# Altium PCB GPS.PcbDoc
Units mm, origin at the board's own origin, x right, y up, seen from the top; angles counter-clockwise.
Board outline 41.35 x 34.25 mm, 4 copper layers (Top Layer, Inner Layer 1, Inner Layer 2, Bottom Layer), stack 0.778 mm thick; 80 components, 55 nets, 369 pads, 241 vias.
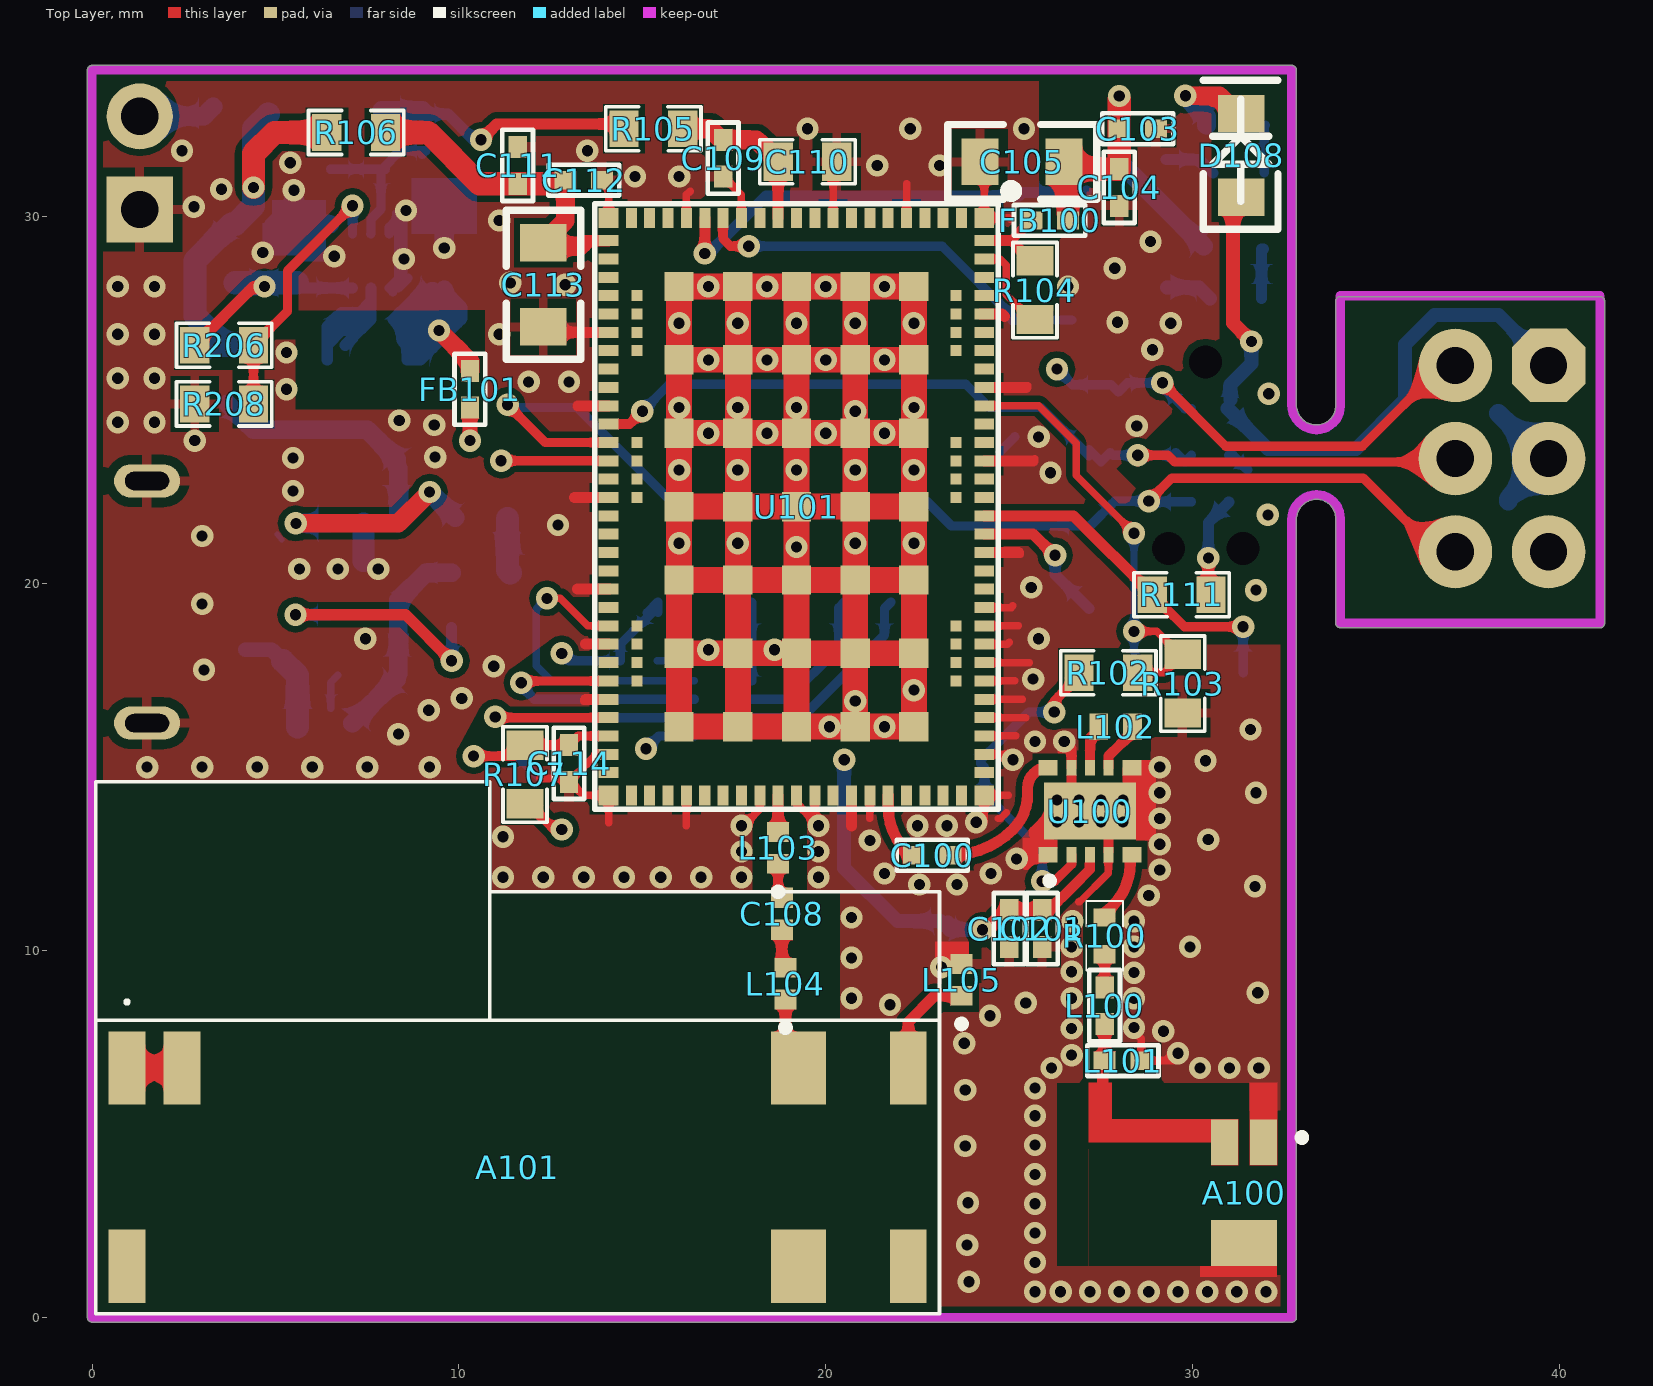
[diagram p0: Top Layer view]
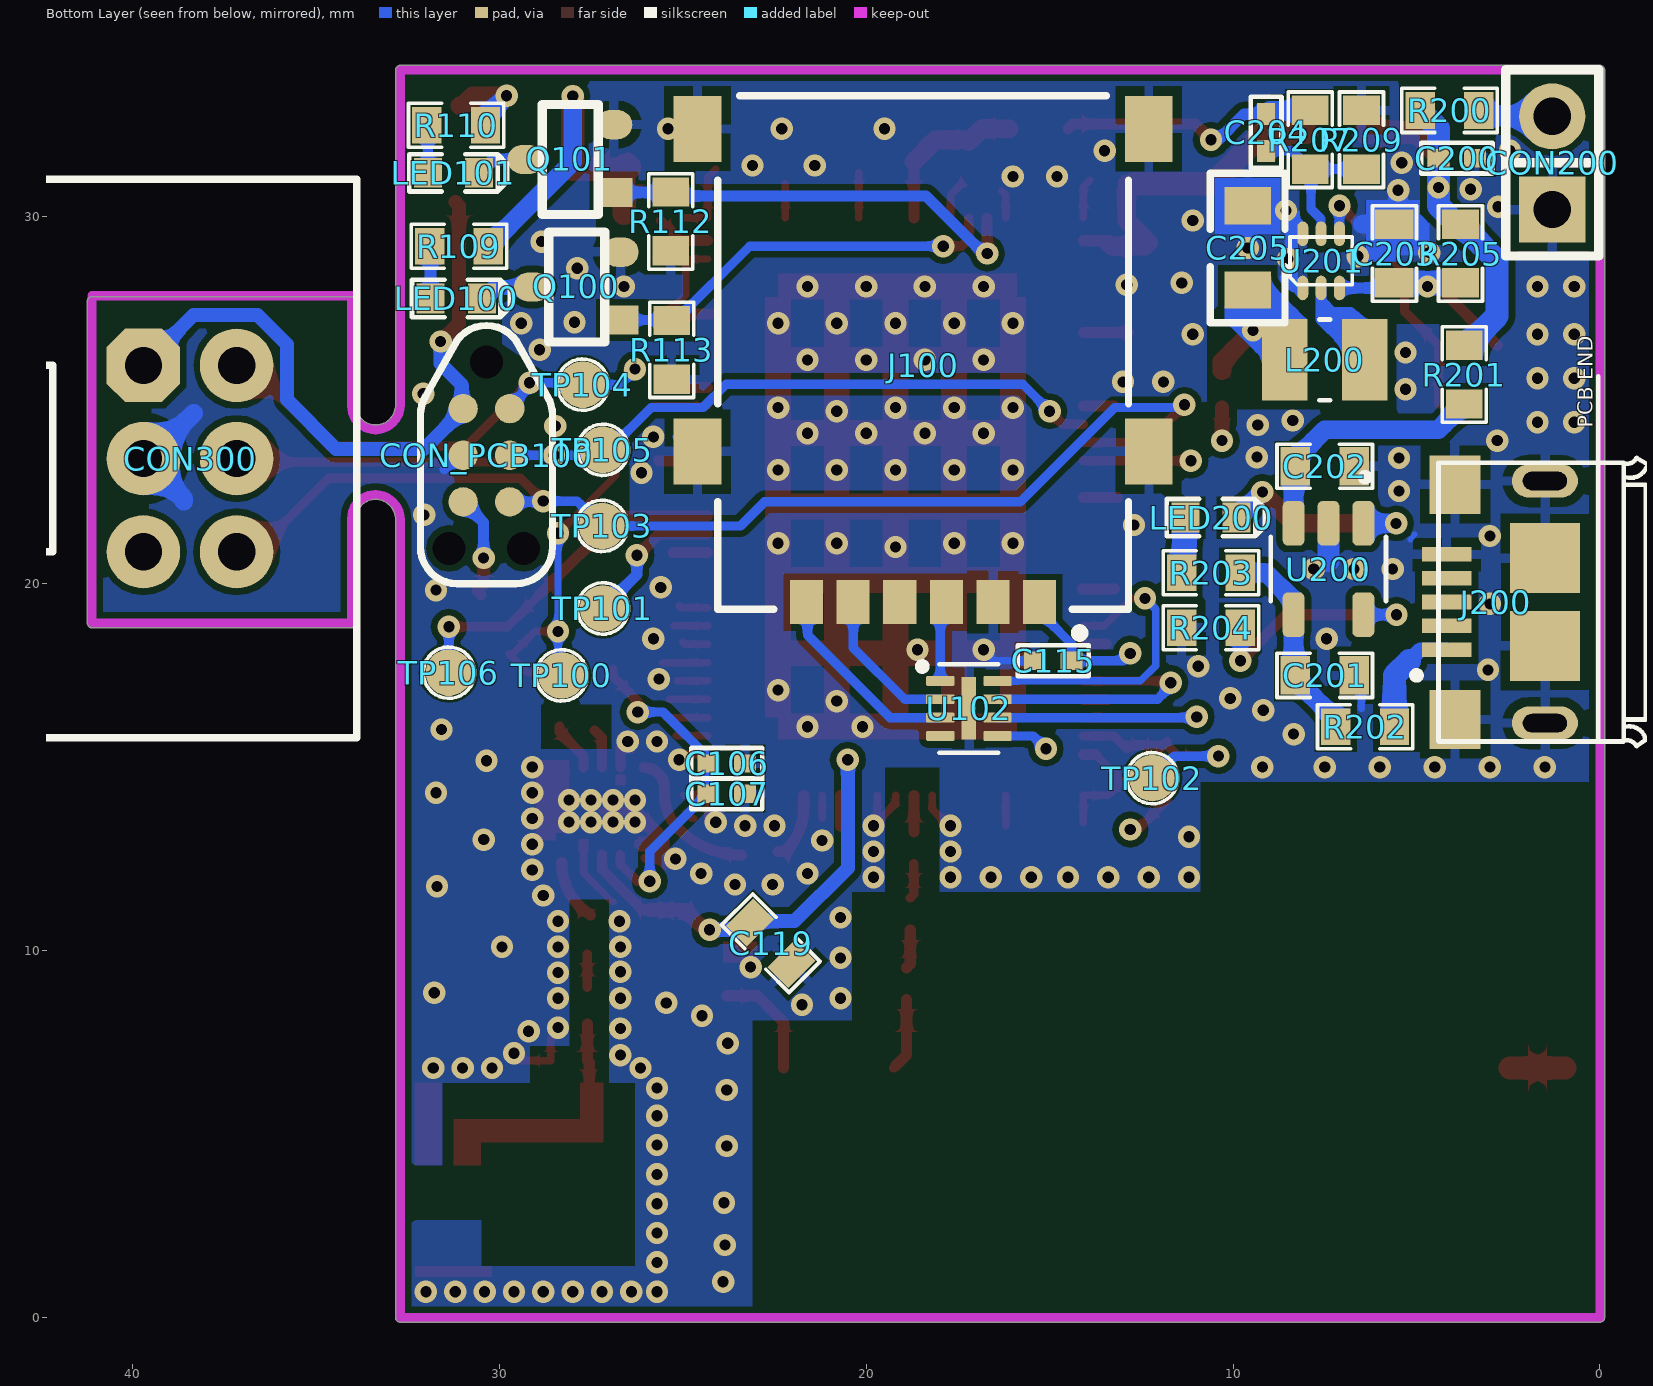
[diagram p1: Bottom Layer view, seen from below]
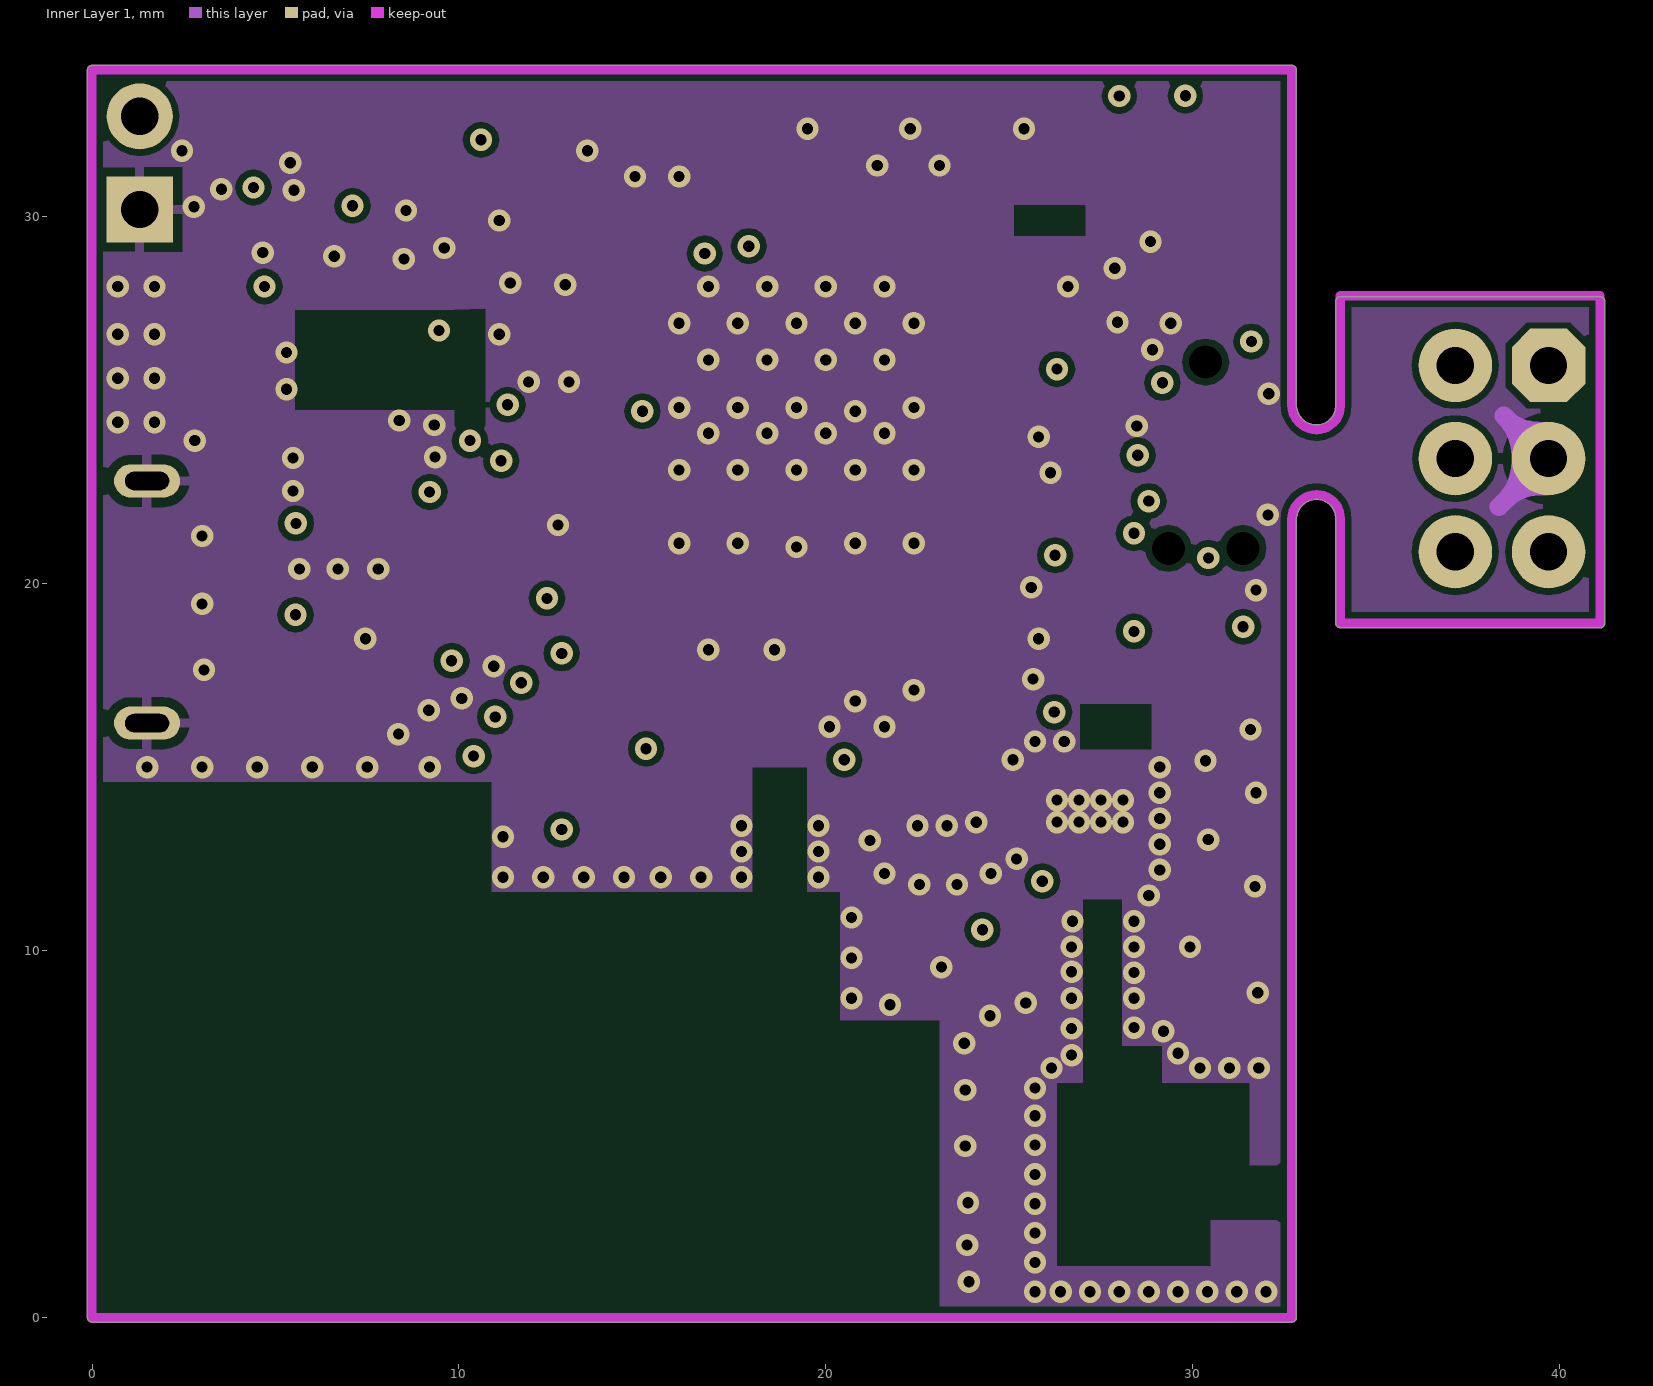
[diagram p2: Inner Layer 1]
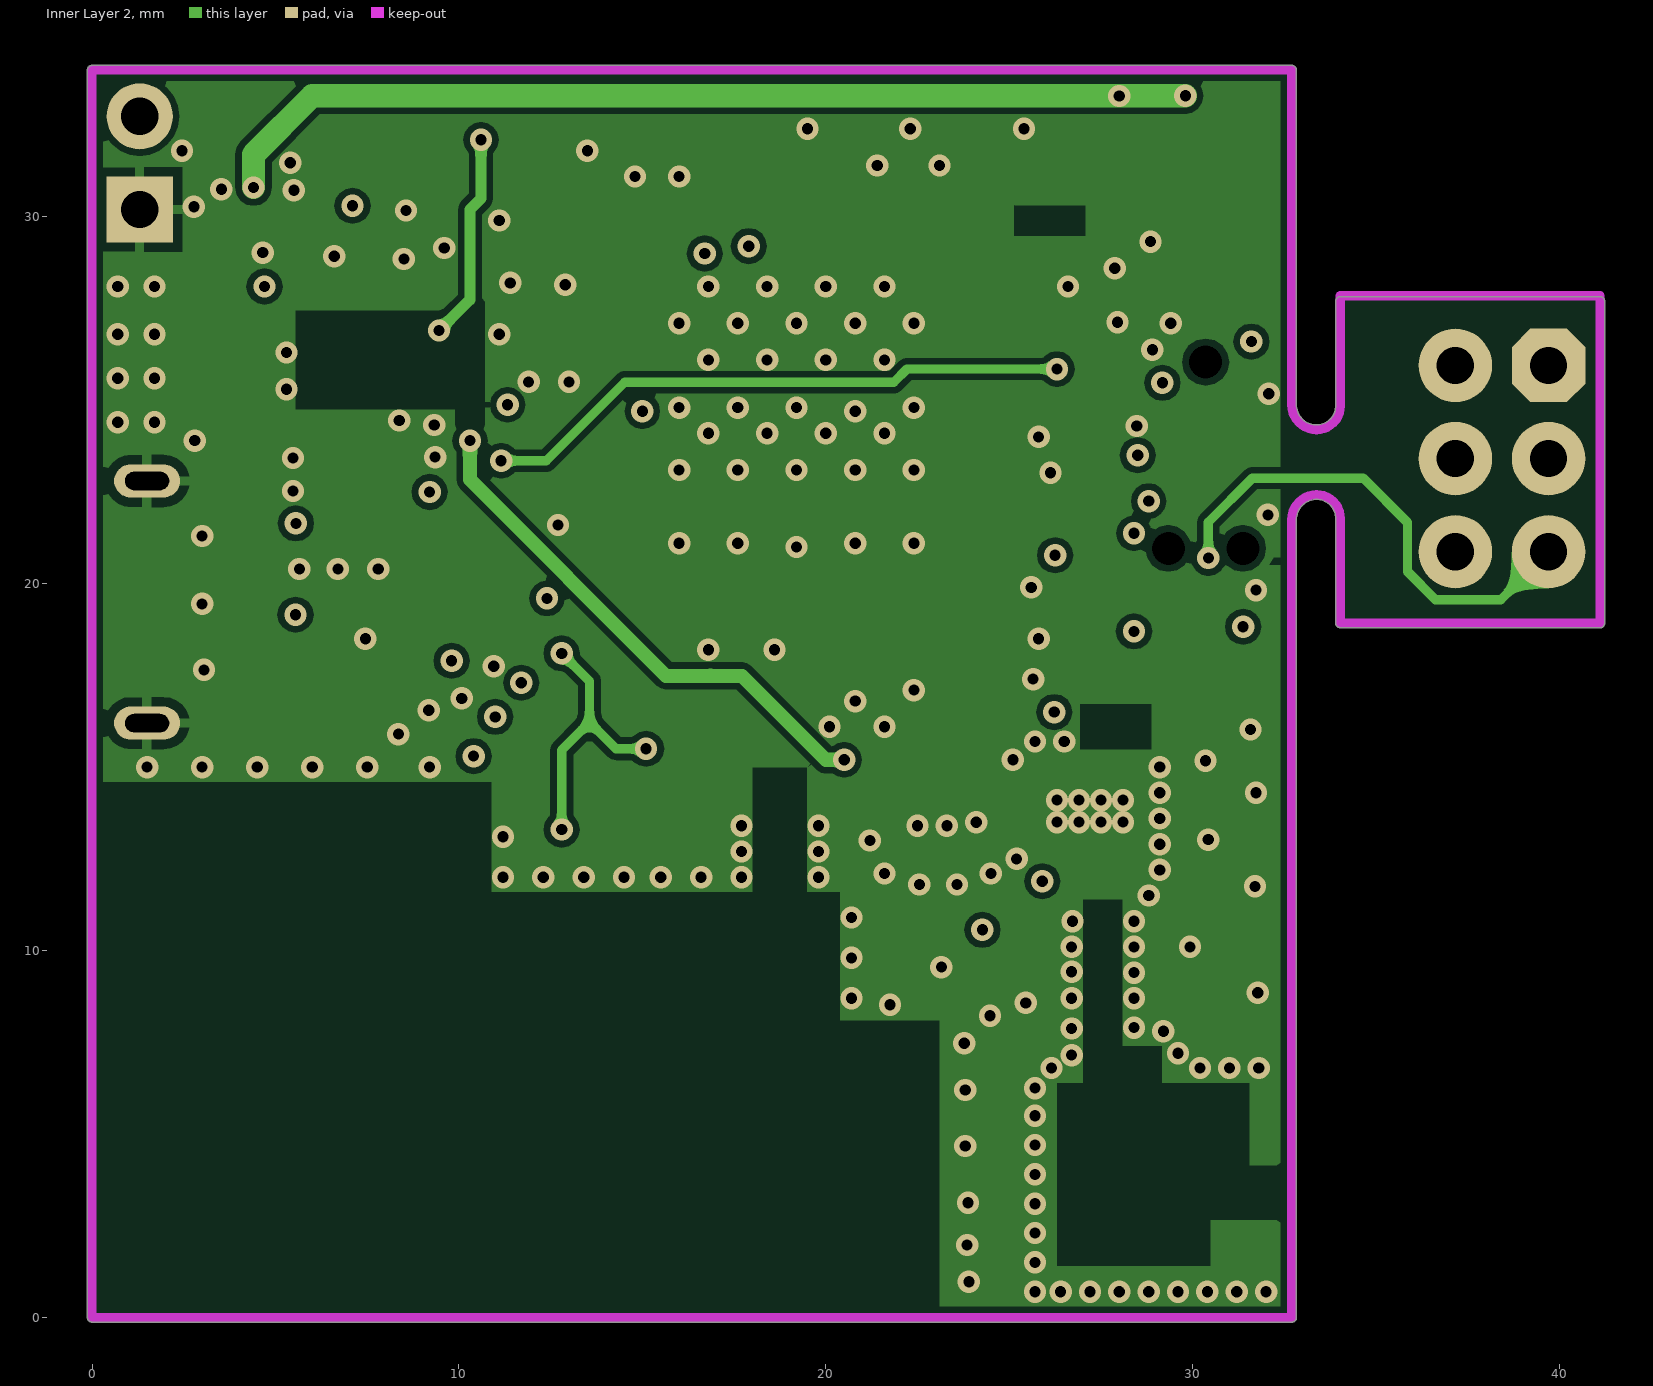
[diagram p3: Inner Layer 2]
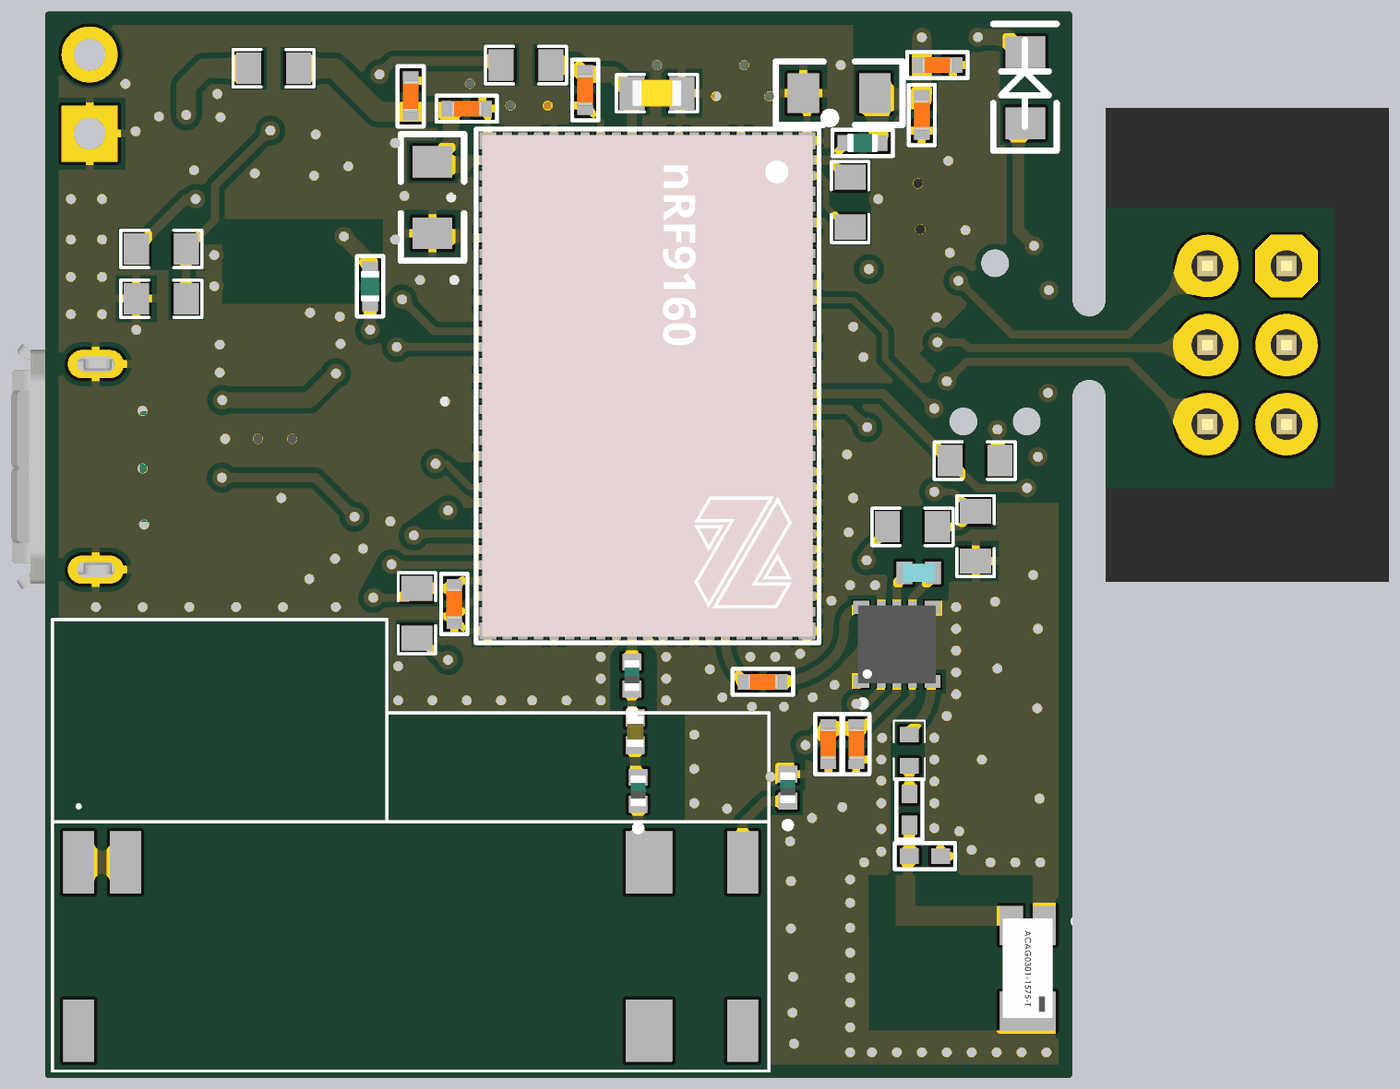
[diagram p4: 3D render of the assembled board from above, using the file's embedded part models]
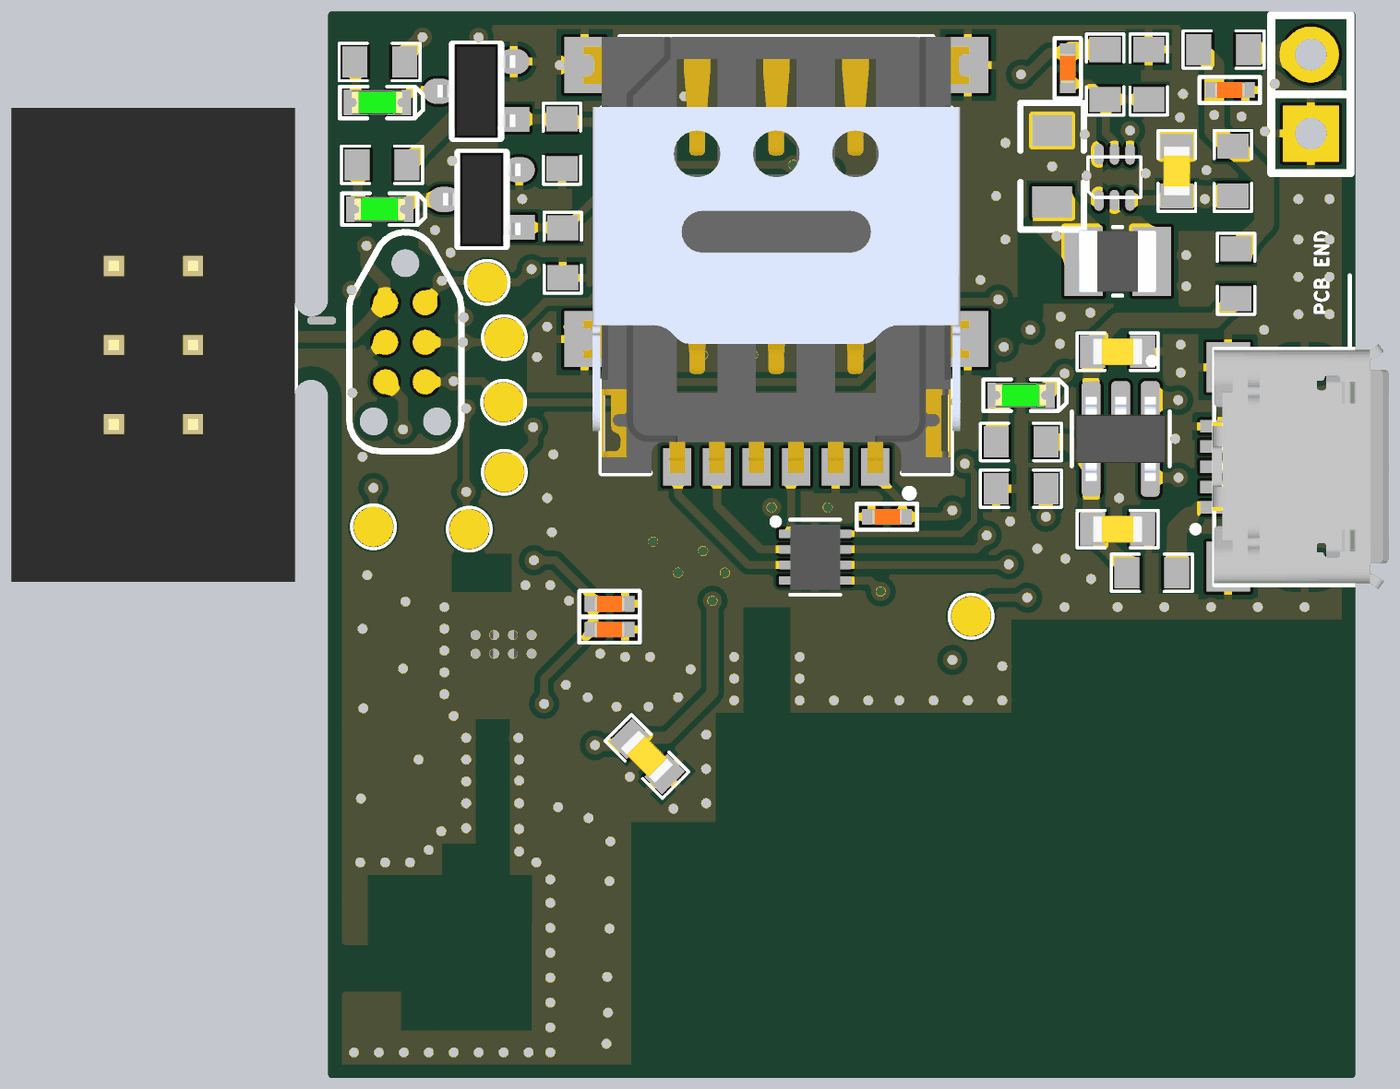
[diagram p5: 3D render of the assembled board from below, using the file's embedded part models]

## Layer stack, top to bottom
Top Solder: solder mask 0.0102, Solder Resist, Dk 3.5
Top Layer: signal copper 0.0356
Dielectric 1: core 0.254, FR-4, Dk 4.2
Inner Layer 1: signal copper 0.036
Dielectric 3: prepreg 0.127, Dk 4.2
Inner Layer 2: signal copper 0.036
Dielectric 2: core 0.254, Dk 4.2
Bottom Layer: signal copper 0.0356
Bottom Solder: solder mask 0.0102, Solder Resist, Dk 3.5

## Board outline
-0.127,0 ccw(c0,0) 0,-0.127 32.7,-0.127 ccw(c32.7,0) 32.827,0 32.827,21.75 cw(c33.375,21.75) 33.375,22.298 cw(c33.375,21.775) 33.898,21.775 33.898,18.929 ccw(c34.025,18.929) 34.025,18.802 41.068,18.802 ccw(c41.1,18.925) 41.227,18.925 41.227,27.7 ccw(c41.1,27.7) 41.087,27.827 ccw(c41.075,27.7) 41.075,27.827 34.025,27.827 ccw(c34.025,27.7) 33.898,27.7 33.898,24.85 cw(c33.375,24.85) 33.375,24.327 cw(c33.375,24.875) 32.827,24.875 32.827,34 ccw(c32.7,34) 32.7,34.127 0,34.127 ccw(c0,34) -0.127,34

## Design rules (kind name [scope] priority, off if disabled: settings)
Clearance Clearance_GPS [All] p1: gap=0.178
Clearance [All] p2: gap=0.254
PolygonConnect PolygonConnect_1 [IsVia] p1: connectstyle=Direct reliefconductorwidth=0.254 reliefentries=4 polygonreliefangle="90 Angle" airgapwidth=0.254
PolygonConnect [All] p2: connectstyle=Relief reliefconductorwidth=0.254 reliefentries=4 polygonreliefangle="90 Angle" airgapwidth=0.254
RoutingVias [All] p1: holewidth=0.305 width=0.61 viastyle="Through Hole" minholewidth=0.305 minwidth=0.254 maxholewidth=0.305 maxwidth=0.61 viatemplateguid#1={65914C9B-4562-4544-A635-BAAE67BD8CD0} viatemplatename#1=v61h30m0mx0
SolderMaskExpansion [All] p1: expansion=0.102
Width [All] p1: maxlimit=0.762 minlimit=0.127 preferedwidth=0.254 midlayer1_minwidth=0.254 midlayer2_minwidth=0.254 minimp=50.000000 maximp=50.000000 favimp=50.000000
30 further rules are at their usual default settings.

## Classes and differential pairs
component class Power: BAT200 Battery? C200 C201 C202 C203 C204 C205 CON200 J200 L200 LED200 R200 R201 R202 R203 R204 R205 R206 R207 R208 R209 U200 U201
component class NRF9160: A100 A101 C100 C101 C102 C103 C104 C105 C106 C107 C108 C109 C110 C111 C112 C113 C114 C115 C119 CON300 CON_PCB100 D108 FB100 FB101 J100 L100 L101 L102 L103 L104 L105 LED100 LED101 Q100 Q101 R100 R102 R103 R104 R105 R106 R107 R109 R110 R111 R112 R113 TP100 TP101 TP102 TP103 TP104 TP105 TP106 U100 U101 U102

## Components (designator, comment, footprint, x,y, rotation, side; value= is the part's Value field where it differs from the comment)
A100 "ACAG0301-1575-T" ANT_ACAG0301-1575-T 31.4,3.4 r270 top
A101 "SR4L049-X" SR4L049R 11.6,4.1 r180 top
BAT200 "Li-Po Battery 500mAh" "Battery 500maH" 12.875,50.85 r90 top
C100 "39p" 0402_C 22.9,12.6 r180 top
C101 "100p" 0402_C 25.9,10.6 r90 top
C102 "100n" 0402_C 25,10.6 r90 top
C103 "15p" 0402_C 28.5,32.4 r180 top
C104 "100n" 0402_C 28,30.8 r90 top
C105 "47u" 0805_c 24.2,31.5 r0 top
C106 "100n" 0402_C 23.8,15.1 r0 bottom
C107 "100p" 0402_C 23.8,14.275 r0 bottom
C108 "GJM1555C1H1R2WB01D" CAPC1005X55N 18.8,11 r90 top
C109 "100n" 0402_C 17.2,31.6 r90 top
C110 "4u7" 0603_C 19.5,31.5 r180 top
C111 "15p" 0402_C 11.6,31.4 r270 top
C112 "100n" 0402_C 13.4,31 r180 top
C113 "47u" 0805_c 12.3,27 r90 top
C114 "100n" 0402_C 13,15.1 r270 top
C115 "10n" 0402_C 14.9,17.9 r180 bottom
C119 "4u7" 0603_C 22.6,10.2 r45 bottom
C200 "100n" 0402_C 3.9,31.6 r0 bottom
C201 "4u7" 0603_C 7.5,17.5 r0 bottom
C202 "4u7" 0603_C 7.5,23.2 r0 bottom
C203 "4u7" 0603_C 5.6,29 r270 bottom
C204 "120p" 0402_C 9.1,32.3 r90 bottom
C205 "22u" 0805_c 9.6,30.3 r270 bottom
CON200 "pin1x2" piny1x2 1.3,30.2 r90 bottom
CON300 "T821-1-06-S1" IDC_2X3_2.54MM 39.7,25.95 r270 bottom
CON_PCB100 "DNP/TC2030-MCP-NL - PCB" "TC2030-MCP-NL - PCB" 30.35,23.5 r270 bottom
D108 "TS4148-RYG" 0805D 31.325,31.675 r90 top
FB100 "BLM15AX121SN1D" 0402_L 26.1,29.9 r180 top
FB101 "BLM15AX121SN1D" 0402_L 10.3,25.3 r90 top
J100 "SIM8060-6-0-14-00-A" GCT_SIM8060-6-0-14-00-A 18.45,26.3 r0 bottom
J200 "10118193-0001LF" FCI_10118193-0001LF 1.5,19.5 r90 bottom
L100 "2n4" 0402 27.6,8.5 r270 top
L101 "5n6" 0402 28.1,7 r180 top
L102 "LQW15AN9N1J00D" INDC1006X60N 27.9,16.1 r180 top
L103 "LQG15HN4N7S02D" INDC1005X55N 18.7,12.8 r270 top
L104 "LQG15HN2N2S02D" INDC1005X55N 18.9,9.1 r270 top
L105 "LQG15HN3N3S02D" INDC1005X55N 23.7,9.2 r270 top
L200 "DFE252012F-1R0M=P2" INDC2520X120N 7.5,26.1 r0 bottom
LED100 "L0603G" LED_0603_G 31.175,27.775 r0 bottom
LED101 "L0603G" LED_0603_G 31.25,31.2 r0 bottom
LED200 "L0603G" LED_0603_G 10.6,21.8 r0 bottom
Q100 "BSH105,215" SOT23-3D 27.9,28.1 r90 bottom
Q101 "BSH105,215" SOT23-3D 28.075,31.575 r90 bottom
R100 "0R" 0402_r 27.6,10.4 r90 top
R102 "0R" 0603 27.7,17.575 r0 top
R103 "1M" 0603 29.725,17.275 r90 top
R104 "10k" 0603 25.7,28 r90 top
R105 "0R" 0603 15.3,32.4 r180 top
R106 "0R" 0603 7.2,32.3 r180 top
R107 "0R" 0603 11.8,14.8 r270 top
R109 "250R" 0603 31.1,29.2 r0 bottom
R110 "250R" 0603 31.175,32.5 r0 bottom
R111 "1k" 0603 29.7,19.7 r0 top
R112 "10k" 0603 25.325,29.875 r270 bottom
R113 "10k" 0603 25.3,26.375 r270 bottom
R200 "0R" 0603 4.1,32.9 r180 bottom
R201 "0R" 0603 3.7,25.7 r270 bottom
R202 "0R" 0603 6.4,16.1 r180 bottom
R203 "470R" 0603 10.6,20.3 r0 bottom
R204 "6k65" 0603 10.6,18.8 r0 bottom
R205 "0R" 0603 3.8,29 r90 bottom
R206 "0R" 0603 3.6,26.5 r0 top
R207 "200k" 0603 7.9,32.1 r270 bottom
R208 "DNP" 0603 3.6,24.9 r180 top
R209 "100k" 0603 6.5,32.1 r90 bottom
TP100 "testpointMini" testpoint_50mils_round 28.3,17.5 r0 bottom
TP101 "testpointMini" testpoint_50mils_round 27.175,19.325 r90 bottom
TP102 "testpointMini" testpoint_50mils_round 12.2,14.7 r270 bottom
TP103 "testpointMini" testpoint_50mils_round 27.2,21.575 r0 bottom
TP104 "testpointMini" testpoint_50mils_round 27.725,25.425 r0 bottom
TP105 "testpointMini" testpoint_50mils_round 27.175,23.65 r90 bottom
TP106 "testpointMini" testpoint_50mils_round 31.375,17.575 r90 bottom
U100 "SKY65943-11" IC_SKY65943-11 27.2,13.8 r90 top
U101 "Value" NRF9160_SIP 19.2,22.1 r270 top
U102 "TPD3F303DPVR" SON50P210X160X65-9N 17.2,16.6 r180 bottom
U200 "MCP73832T-2DCI/OT" SOT95P280X145-5N 7.4,20.4 r270 bottom
U201 "TPS62A01DRLR" TPS62A01DRLR 7.6,28.8 r90 bottom

## Footprints (in the part's own frame and the unit in brackets; to place one, negate y for a bottom-side part, rotate by r counter-clockwise, add the part's x,y. Pads: shape width x height; smd on the part's side, far side on the other; paste and mask are expansions set on the pad)
0402 [mm] "Chip Capacitor, Body 1.0x0.5mm, IPC High Density"
  rect 0.6x0.5 smd: 1(-0.5,0) 2(0.5,0)
  silkscreen extent -0.97,-0.42 0.97,0.42, body extent -0.55,-0.3 0.55,0.3, height 0.3
0402_C [mm] "Chip Capacitor, Body 1.0x0.5mm, IPC High Density"
  rect 0.6x0.5 smd: 1(-0.5,0) 2(0.5,0)
  silkscreen extent -0.97,-0.42 0.97,0.42, body extent -0.51,-0.25 0.51,0.25, height 0.5
0402_L [mm] "Chip inductor, Body 1.0x0.5mm, IPC High Density"
  rect 0.6x0.5 smd: 1(-0.5,0) 2(0.5,0)
  silkscreen extent -0.97,-0.42 0.97,0.42, body extent -0.5,-0.3 0.5,0.3, height 0.5
0402_r [mm] "walsin chip-r"
  rect 0.5x0.6 smd: 1(-0.5,0) 2(0.5,0)
  silkscreen extent -0.95,-0.5 0.95,0.5, body extent -0.53,-0.29 0.53,0.29, height 0.56
0603 [mm]
  rect 0.8x1 smd: 1(-0.8,0) 2(0.8,0)
  silkscreen extent -1.3,-0.6 1.3,0.6, body extent -0.87,-0.48 0.87,0.48, height 0.55
0603_C [mm] "1,6x0,81x0,9h avx wysokosc G tolerancja +0,15"
  rect 0.8x1.05 smd: 1(-0.8,0) 2(0.8,0)
  silkscreen extent -1.3,-0.6 1.3,0.6, body extent -0.8,-0.43 0.8,0.43, height 0.8
0805_c [mil]
  rect 40x50 smd: 1(0,0) 2(90.27,0)
  silkscreen extent -35,-40 125,40, body extent 6,-25 85,25, height 39
0805D [mil] "0805D"
  rect 40x50 smd: 1(45,0) 2(-45,0)
  silkscreen extent -79,-39 81,41, body extent -40,-25 39,25, height 39
ANT_ACAG0301-1575-T [mm]
  rect 1.25x0.74 smd: 1(-1.375,0.53) 2(-1.375,-0.53)
  rect 1.25x1.8 smd: 3(1.375,0)
  Top Layer region: -0.75,0.16 -3,0.16 -3,0.9 -0.75,0.9
  Top Layer region: -0.75,-0.9 -1.37,-0.9 -1.37,-4.24 -3,-4.24 -3,-3.61 -2,-3.61 -2,-0.16 -0.75,-0.16
  Top Overlay keep-out region: 0.75,-0.9 2,-0.9 2,-4.24 -1.37,-4.24 -1.37,-0.9 -0.75,-0.9 -0.75,-0.16 -2,-0.16 -2,-3.61 -3,-3.61 -3,0.16 -0.75,0.16 -0.75,0.9 0.75,0.9
  silkscreen extent -3,-4.24 2,1.68, body extent -1.6,-0.8 1.6,0.8, height 0.6
"Battery 500maH" [mm]
  body extent -17.6,-19.7 16.9,18.3, height 6.53
CAPC1005X55N [mm]
  rect 0.56x0.6 smd: 1(-0.435,0) 2(0.435,0)
  body extent -0.5,-0.28 0.5,0.27, height 0.55
FCI_10118193-0001LF [mm]
  rect 0.4x1.35 smd: 1(-1.3,2.675) 2(-0.65,2.675) 3(0,2.675) 4(0.65,2.675) 5(1.3,2.675)
  rect 1.6x1.4 smd: S1(-3.2,2.45) S2(3.2,2.45)
  rect 1.9x1.9 smd: S3(1.2,0) S4(-1.2,0)
  oval 0.9x1.8 hole 0.5 slot 1.2 at 90 deg: S5(-3.3,0) S6(3.3,0)
  silkscreen extent -3.93,-2.8 6.15,3.6, body extent -3.92,-2.7 3.94,2.96, height 3.18
GCT_SIM8060-6-0-14-00-A [mm]
  rect 0.9x1.2 smd: C1(-3.175,6.8) C2(-0.635,6.8) C3(1.905,6.8) C5(-1.905,6.8) C6(0.635,6.8) C7(3.175,6.8)
  rect 1.3x1.8 smd: S1(-6.15,2.7) S2(6.15,2.7) S3(6.15,-6.1) S4(-6.15,-6.1)
  silkscreen extent -5.6,-7 5.6,7.76, body extent -6.2,-7 6.2,7, height 1.53
IC_SKY65943-11 [mm]
  rect 0.425x0.515 smd mask+0: 1(-1.187,1.144) 5(-1.187,-1.144) 6(1.188,-1.144) 10(1.188,1.144)
  rect 0.425x0.275 smd mask+0: 2(-1.188,0.5) 3(-1.187,0) 4(-1.187,-0.5) 7(1.188,-0.5) 8(1.188,0) 9(1.188,0.5)
  rect 1.55x2.5 smd paste-2: 11(0,0)
  Top Layer region: -1.143,-0.637 -0.762,-0.637 -0.762,-0.363 -1.143,-0.363
  Top Layer region: 0.775,-1.25 1.188,-1.25 1.188,-0.886 0.775,-0.886
  Top Layer region: -1.016,1.143 -0.925,1.143 -0.925,1.25 -1.016,1.25
  Top Layer region: -1.016,0.885 -0.775,0.885 -0.775,1.143 -1.016,1.143
  Top Layer region: -0.925,1.143 -0.775,1.143 -0.775,1.25 -0.925,1.25
  Top Layer region: 0.7,0.362 1,0.362 1,0.638 0.7,0.638
  silkscreen extent -2,1 -1.8,1.2, body extent -1.25,-1.25 1.25,1.25, height 0.7
IDC_2X3_2.54MM [mm] "IDC_2X3_2.54MM"
  oct 2x2 hole 1.016: 1(0,0)
  round 2 hole 1.016: 2(0,2.54) 3(2.54,0) 4(2.54,2.54) 5(5.08,0) 6(5.08,2.54)
  silkscreen extent -5.07,-3.29 10.15,5.81, body extent -5.07,-3.29 10.15,5.81, height 9.1
INDC1005X55N [mm]
  rect 0.54x0.6 smd: 1(-0.432,0) 2(0.432,0)
  silkscreen extent 1.1,-0.1 1.3,0.1, body extent -0.5,-0.25 0.5,0.25, height 0.65
INDC1006X60N [mm]
  rect 0.51x0.73 smd: 1(-0.46,0) 2(0.46,0)
  body extent -0.5,-0.3 0.5,0.3, height 0.6
INDC2520X120N [mm]
  rect 1.24x2.22 smd: 1(-1.09,0) 2(1.09,0)
  silkscreen extent -0.15,-1.1 0.15,1.1, body extent -1.25,-1 1.25,1, height 1.2
LED_0603_G [mil]
  rect 30x32 smd: 1(-27.5,0) 2(27.5,0)
  silkscreen extent -57,-20 48,20, body extent -32,-16 32,16, height 24
NRF9160_SIP [mm]
  rect 0.54x0.54 smd mask+0.05: 1(-7.87,5.12) 21(-7.87,-5.12) 52(7.87,-5.12) 72(7.87,5.12)
  rect 0.54x0.3 smd mask+0.05: 2(-7.87,4.5) 3(-7.87,4) 4(-7.87,3.5) 5(-7.87,3) 6(-7.87,2.5) 7(-7.87,2) 8(-7.87,1.5) 9(-7.87,1) 10(-7.87,0.5) 11(-7.87,0) 12(-7.87,-0.5) 13(-7.87,-1) 14(-7.87,-1.5) 15(-7.87,-2) 16(-7.87,-2.5) 17(-7.87,-3) 18(-7.87,-3.5) 19(-7.87,-4) 20(-7.87,-4.5) 53(7.87,-4.5) 54(7.87,-4) 55(7.87,-3.5) 56(7.87,-3) 57(7.87,-2.5) 58(7.87,-2) 59(7.87,-1.5) 60(7.87,-1) 61(7.87,-0.5) 62(7.87,0) 63(7.87,0.5) 64(7.87,1) 65(7.87,1.5) 66(7.87,2) 67(7.87,2.5) 68(7.87,3) 69(7.87,3.5) 70(7.87,4) 71(7.87,4.5)
  rect 0.3x0.54 smd mask+0.05: 22(-7.25,-5.12) 23(-6.75,-5.12) 24(-6.25,-5.12) 25(-5.75,-5.12) 26(-5.25,-5.12) 27(-4.75,-5.12) 28(-4.25,-5.12) 29(-3.75,-5.12) 30(-3.25,-5.12) 31(-2.75,-5.12) 32(-2.25,-5.12) 33(-1.75,-5.12) 34(-1.25,-5.12) 35(-0.75,-5.12) 36(-0.25,-5.12) 37(0.25,-5.12) 38(0.75,-5.12) 39(1.25,-5.12) 40(1.75,-5.12) 41(2.25,-5.12) 42(2.75,-5.12) 43(3.25,-5.12) 44(3.75,-5.12) 45(4.25,-5.12) 46(4.75,-5.12) 47(5.25,-5.12) 48(5.75,-5.12) 49(6.25,-5.12) 50(6.75,-5.12) 51(7.25,-5.12) 73(7.25,5.12) 74(6.75,5.12) 75(6.25,5.12) 76(5.75,5.12) 77(5.25,5.12) 78(4.75,5.12) 79(4.25,5.12) 80(3.75,5.12) 81(3.25,5.12) 82(2.75,5.12) 83(2.25,5.12) 84(1.75,5.12) 85(1.25,5.12) 86(0.75,5.12) 87(0.25,5.12) 88(-0.25,5.12) 89(-0.75,5.12) 90(-1.25,5.12) 91(-1.75,5.12) 92(-2.25,5.12) 93(-2.75,5.12) 94(-3.25,5.12) 95(-3.75,5.12) 96(-4.25,5.12) 97(-4.75,5.12) 98(-5.25,5.12) 99(-5.75,5.12) 100(-6.25,5.12) 101(-6.75,5.12) 102(-7.25,5.12)
  rect 0.8x0.8 smd mask+0.05: 103(-6,3.2) 103(-6,-1.6) 103(-6,0) 103(-6,1.6) 103(-6,-3.2) 103(-4,3.2) 103(-4,-1.6) 103(-4,0) 103(-4,1.6) 103(-4,-3.2) 103(-2,3.2) 103(-2,1.6) 103(-2,0) 103(-2,-1.6) 103(-2,-3.2) 103(0,3.2) 103(0,1.6) 103(0,0) 103(0,-1.6) 103(0,-3.2) 103(2,3.2) 103(2,1.6) 103(2,0) 103(2,-1.6) 103(2,-3.2) 103(4,3.2) 103(4,-1.6) 103(4,0) 103(4,1.6) 103(4,-3.2) 103(6,3.2) 103(6,-1.6) 103(6,0) 103(6,1.6) 103(6,-3.2)
  rect 0.3x0.3 smd mask+0.05: 104(-5.75,-4.35) 105(-5.25,-4.35) 106(-4.75,-4.35) 107(-4.25,-4.35) 108(-1.75,-4.35) 109(-1.25,-4.35) 110(-0.75,-4.35) 111(-0.25,-4.35) 112(3.25,-4.35) 113(3.75,-4.35) 114(4.25,-4.35) 115(4.75,-4.35) 116(4.75,4.35) 117(4.25,4.35) 118(3.75,4.35) 119(3.25,4.35) 120(-0.25,4.35) 121(-0.75,4.35) 122(-1.25,4.35) 123(-1.75,4.35) 124(-4.25,4.35) 125(-4.75,4.35) 126(-5.25,4.35) 127(-5.75,4.35)
  Top Layer region: 6.35,3.2 5.644,3.2 5.644,-3.315 6.35,-3.315
  Top Layer region: 4.35,3.2 3.644,3.2 3.644,-3.315 4.35,-3.315
  Top Layer region: 2.35,3.2 1.644,3.2 1.644,-3.315 2.35,-3.315
  Top Layer region: 0.35,3.2 -0.356,3.2 -0.356,-3.315 0.35,-3.315
  Top Layer region: -1.65,3.2 -2.356,3.2 -2.356,-3.315 -1.65,-3.315
  Top Layer region: -3.65,3.2 -4.356,3.2 -4.356,-3.315 -3.65,-3.315
  Top Layer region: -5.65,3.2 -6.356,3.2 -6.356,-3.315 -5.65,-3.315
  Top Layer region: 5.751,-3.55 5.751,-2.844 -5.714,-2.844 -5.714,-3.55
  Top Layer region: 5.751,-1.95 5.751,-1.244 -5.714,-1.244 -5.714,-1.95
  Top Layer region: 5.75,-0.351 5.75,0.355 -5.715,0.355 -5.715,-0.351
  Top Layer region: 5.751,1.25 5.751,1.956 -5.714,1.956 -5.714,1.25
  Top Layer region: 5.751,2.85 5.751,3.556 -5.714,3.556 -5.714,2.85
  Top Layer pour cut-out: -8.15,5.4 8.15,5.4 8.15,-5.4 -8.15,-5.4
  silkscreen extent -8.75,-5.5 8.25,6, body extent -8.05,-5.3 8.05,5.3, height 1.2
piny1x2 [mm]
  rect 1.8x1.8 hole 1.016: 1(0,0)
  round 1.8 hole 1.016: 2(2.54,0)
  silkscreen extent -1.27,-1.27 3.81,1.27
SON50P210X160X65-9N [mm]
  rrect25% 0.77x0.27 smd: 1(-0.78,0.75) 2(-0.78,0.25) 3(-0.78,-0.25) 4(-0.78,-0.75) 5(0.78,-0.75) 6(0.78,-0.25) 7(0.78,0.25) 8(0.78,0.75)
  rect 0.4x1.7 smd paste-2: 9(0,0)
  silkscreen extent -1.37,-1.2 0.8,1.24, body extent -0.8,-1.05 0.8,1.05, height 0.73
SOT23-3D [mm]
  rect 0.8x1 smd: 1(-0.911,-1.2)
  oval 0.8x1 smd: 2(0.939,-1.2) 3(-0.011,1.2)
  silkscreen extent -1.51,-0.77 1.49,0.75, body extent -1.51,-1.25 1.49,1.25, height 1.05
SOT95P280X145-5N [mm]
  rrect50% 1.22x0.6 smd: 1(-1.245,0.95) 2(-1.245,0) 3(-1.245,-0.95) 4(1.245,-0.95) 5(1.245,0.95)
  silkscreen extent -2.6,-1.57 0.88,1.57, body extent -1.35,-1.45 1.35,1.45, height 1.45
SR4L049R [mm]
  rect 1x2 smd: 1(10.65,-2.7) 2(9.15,-2.7) 4(-10.65,-2.7) 5(-10.65,2.7) 7(10.65,2.7)
  rect 1.5x2 smd: 3(-7.65,-2.7) 6(-7.65,2.7)
  silkscreen extent -11.5,-10.5 11.5,4, body extent -11.5,-4 11.5,4, height 3.5
"TC2030-MCP-NL - PCB" [mm]
  round 0.8 smd paste-0.4: 1(-1.27,-0.635) 2(0,-0.635) 3(1.27,-0.635) 4(1.27,0.635) 5(0,0.635) 6(-1.27,0.635)
  round 0.85 hole 0.9 unplated mask+0: ""(-2.54,0) ""(2.54,-1.016) ""(2.54,1.016)
  silkscreen extent -3.54,-1.8 3.5,1.8, body extent -3.54,-1.8 3.5,1.8, height 0.5
testpoint_50mils_round [mm]
  round 1.27 smd paste-0.635: 1(0,0)
  silkscreen extent -0.7,-0.7 0.7,0.7
TPS62A01DRLR [mm]
  oval 0.67x0.3 smd: 1(-0.74,0.5) 2(-0.74,0) 3(-0.74,-0.5) 4(0.74,-0.5) 5(0.74,0) 6(0.74,0.5)
  silkscreen extent -0.65,-0.85 0.65,0.85, body extent -0.65,-0.85 0.65,0.85, height 0.61

## Part data
A100: "1.575GHz GPS Chip RF Antenna 1.565GHz ~ 1.585GHz 4.18dBi Solder Surface Mount"
A101: "Antenna"
BAT200: "ACCU-LP542439/C"
C100 C101 C102 C103 C104 C105 C106 C107 C109 C110 C111 C112 C113 C114 C115 C119 C200 C201 C202 C203 C204 C205: library part CAP, "Capacitor"
CON200: "1x2"
CON300: library part piny_2x3
CON_PCB100: library part "TC2030-MCP-NL - PCB"
D108: library part DIODE, "Diode"
FB100 FB101: library part Ferrite_Bead, "Ferrite Bead"
J100: "6 Position Card Connector NANO SIM Surface Mount, Right Angle Gold"
J200: "USB - micro B USB 2.0 Receptacle Connector 5 Position Surface Mount, Right Angle; Through Hole"
L100 L101: library part Inductor, "inductor"
L102: "Inductor with Inductance: 9.1nH Tol. +/-5%, Package: 0402 (1005)"
L103 L104 L105: "Ind RF Chip Multi-Layer 2.2nH 0.3nH 100MHz 8Q-Factor Air 300mA 0402 Paper T/R"
L200: "Inductor with Inductance: 1uH Tol. +/-20%, Package: 1008 _2520_"
LED100 LED101 LED200: library part D:LED, "LED, Green, 0603, 573nm, Vf=2.0V, 24mcd, - 40 to +85°C"
Q100 Q101: library part BSS123_MN, "MOSFET N-CH, 170V, 6Ohm, 170mA, Single"
R100 R102 R103 R104 R105 R106 R107 R109 R110 R111 R112 R113 R200 R201 R202 R203 R204 R205 R206 R207 R208 R209: library part RES
U100: "RF Front End 1.559GHz ~ 1.606GHz Galileo, GLONASS, GNSS, GPS 10-MCM (2.5x2.5)"
U101: library part nRF9160_SIP
U102: "None <a href=\"https://snapeda.com/parts/TPD3F303DPVR/Texas%20Instruments/view-part/?ref=eda\">Check prices</a>"
U200: "Charger IC Lithium Ion/Polymer SOT-23-5"

## Via types
v1: diameter 0.61, hole 0.305, Top Layer to Bottom Layer, tented both sides, 233 vias
v2: diameter 0.61, hole 0.3, Top Layer to Bottom Layer, tented both sides, 8 vias

## Nets (pads, with @x,y where several pads share a name; then routed paths per layer and width w, separated by ;. In a path a pad name is that pad's centre, name@x,y a point inside that pad or via, vN(x,y) a via of type N, cw(c..) or ccw(c..) an arc to the next point about the centre after c; other vN are vias at no path point)
+1V8: C204.2 C205.2 FB101.2 L200.2 R105.2 R207.1 | length 27.5
  Top Layer w0.305: v1(10.6,32.1) 11.03,32.53 14.37,32.53 R105.2
  Top Layer w0.508: v1(9.458,26.9) 10.3,26.058 FB101.2
  Inner Layer 2 w0.305: v1(9.458,26.9) 10.3,27.742 10.3,30.198 10.6,30.498 v1(10.6,32.1)
  Bottom Layer w0.305: C204.2 9.7,32.8 10.4,32.1 v1(10.6,32.1) ; v1@9.6,27.11 9.96,27.11 ; L200.2 8.95,26.1 9.255,26.405 ; L200.2 8.895,26.405 9.255,26.405 ; L200.2 8.59,26.823 8.209,27.204 9.012,28.007 C205.2@9.387,28.007 ; 9.255,26.405 9.3,26.45 ; 9.3,26.45 9.3,26.5 9.145,26.655 v1@9.505,26.655 ; 9.3,26.45 v1@9.505,26.655 ; C205.2@9.387,28.007 C205.2 ; C205.2@9.387,28.007 9.28,27.9 9.493,27.9 C205.2 ; v1@9.505,26.655 9.96,27.11 ; C205.2 10.075,27.532 10.075,27.225 9.96,27.11
  Bottom Layer w0.508: R207.1 9,32.9 C204.2 ; C205.2@9.6,27.7 C205.2
  Bottom Layer w0.635: L200.2@8.59,26.823 8.59,27.21 C205.2@9.28,27.9 ; L200.2@8.6,26.7 9.6,27.7 v1@9.6,27.11 ; L200.2@8.895,26.405 9.145,26.655 v1@9.6,27.11 ; 9.845,27.225 9.715,27.225 v1@9.6,27.11
+DEBUG: CON300.1 CON_PCB100.1 D108.2 | length 18
  Top Layer w0.381: D108.2@31.2,30.4 31.1,30.3 31.1,27.1 v1(31.6,26.6)
  Bottom Layer w0.381: CON_PCB100.1@30.955,24.77 32.05,23.675 34.45,23.675 35.792,25.017 35.792,26.517 36.593,27.318 38.332,27.318 CON300.1 ; CON_PCB100.1@31.025,25.015 31.025,25.425 31.6,26 v1(31.6,26.6)
+VBAT: C103.2 C104.2 C105.2 C200.2 D108.1 FB100.1 R106.2 R109.1 R110.1 R200.1 R201.1 R205.2 | length 51
  Top Layer w0.508: C105.2@26.393,31.4 26.393,31.3 C105.2@26.493,31.4 ; C105.2 C105.2@26.693,31.3 ; C105.2@26.5,31.407 C105.2@26.493,31.4 ; C105.2@26.593,31.4 C105.2@26.493,31.4 ; v1@28,33.2 v1(28,33.295) ; v1(29.8,33.3) 30.725,33.3 31,33.025 D108.1@31.075,33.025
  Top Layer w0.635: v1(4.4,30.8) 4.4,31.725 4.975,32.3 R106.2 ; FB100.1@26.6,30.1 C105.2@26.6,31.393 ; C105.2@26.693,31.3 C104.2 C103.2 ; C103.2 28,33.2 C103.2
  Inner Layer 2 w0.635: v1(4.4,30.8) 4.4,31.7 6,33.3 v1(29.8,33.3)
  Bottom Layer w0.508: v1(28,33.295) 28,31.5 R109.1 ; v1(29.8,33.3) 30.375,32.725 R110.1
  Bottom Layer w0.635: R201.1 3.6,26.5 2.805,27.295 2.805,28.805 3.095,29.095 3.1,29.1 R205.2 ; R205.2@3.9,29.8 4.4,30.3 v1(4.4,30.8) C200.2 ; C200.2@4.4,31.7 4.4,32.4 R200.1@4.8,32.8
+VBUS: J200.1 R202.2 | length 3.4
  Bottom Layer w0.4: J200.1 4.9,18.2 5.4,17.7
  Bottom Layer w0.635: 5.2,17.9 5.6,17.5 R202.2
+VSIM_1V8: C114.1 R107.1 TP102.1 U101.49 | length 6.8
  Top Layer w0.254: v1(10.4,15.3) 11.5,15.3 R107.1 ; R107.1@11.8,15.7 R107.1@11.9,15.6 ; R107.1@12,15.5 R107.1@11.9,15.6 ; C114.1@12.9,15.5 C114.1 ; U101.49 13.25,15.85 C114.1 ; R107.1@11.9,15.6 C114.1
  Bottom Layer w0.254: v1(10.4,15.3) 11.6,15.3 TP102.1 TP102.1@11.8,15.1
GND: A100.1 A100.3 C101.1 C102.1 C103.1 C104.1 C105.1 C106.1 C107.1 C109.1 C110.1 C111.1 C112.1 C113.1 C114.2 C115.1 C119.1 C200.1 C201.1 C202.1 C203.1 C205.1 CON200.1 CON300.3 CON_PCB100.2 J100.C5 J100.S1 J100.S2 J100.S3 J100.S4 J200.5 J200.S1 J200.S2 J200.S3 J200.S4 J200.S5 J200.S6 L101.1 L105.1 Q100.2 Q101.2 R103.1 R112.2 R113.2 R204.2 R208.2 R209.2 U100.1 U100.4 U100.6 U100.9 U100.11 U101.1 U101.5 U101.9 U101.14 U101.17 U101.21 U101.27 U101.31 U101.36 U101.41 U101.44 U101.47 U101.50 U101.52 U101.56 U101.60 U101.62 U101.63 U101.65 U101.66 U101.72 U101.74 U101.75 U101.76 U101.77 U101.78 U101.79 U101.80 U101.81 U101.82 U101.85 U101.90 U101.94 U101.98 U101.103 U102.9 U200.2 U201.1 U201.6 | length 63
  Top Layer w0.203: 12.2,14.7 12.9,14.7 C114.2 ; 13.4,16.8 13.45,16.85 ; 13.75,15.35 13.1,14.7 13.1,14.53 13.4,14.23 U101.52 14.08,13.48 ; C112.1 14.08,30.82 U101.21 ; 16.2,13.4 U101.56 ; U101.17 16.2,30.6 16.3,30.7 ; C109.1@17.4,30.9 17.7,30.6 U101.14 ; v1(17.7,13.4) 17.752,13.4 18.2,13.848 U101.60 ; U101.62 19.2,14.006 19.7,13.506 U101.63 ; U101.9 C110.1@20.2,31.2 ; 21.2,13.6 U101.66 ; U101.5 22.2,30.9 ; C105.1@24.1,31.3 24.32,31.08 U101.1 24.99,29.97 25.021,29.939 ; v1@24.32,13.52 U101.72 24.97,14.23 ; U101.74 v1@25.05,15.35 ; U101.75 25.175,15.85 ; U101.76 25.45,16.35 ; U101.77 25.35,16.85 ; U101.78 25.15,17.35 ; U101.79 25.55,17.85 ; U101.80 24.95,18.35 25,18.4 ; U101.81 25.25,18.85 ; U101.82 25.05,19.35 25.1,19.4 ; 24.7,13.6 24.761,13.6 24.913,13.752 ; 25.25,20.85 25.3,20.8 ; 25.45,25.35 25.5,25.4 ; 25.545,12.486 25.584,12.401 ; 25.625,13.175 25.625,13.251 26.174,13.8 U100.11@26.417,13.8 ; 25.65,23.35 25.7,23.4 ; 25.658,12.475 25.584,12.401 ; 25.675,12.475 25.667,12.475 25.587,12.395 ; 25.696,13.079 U100.11@26.417,13.8 ; 26.9,11.325 26.915,11.325 27.7,12.11 U100.4 ; U100.11 U100.11@26.417,13.8 ; v1@28.4,7.8 28.6,7.6 L101.1 29.5,7 v1@29.6,7.1 ; 25.557,12.374 25.45,12.3 25.483,12.3 25.557,12.374 ; 25.557,12.374 25.587,12.395 ; 25.557,12.374 25.584,12.401 ; 25.584,12.401 25.587,12.395
  Top Layer w0.254: 25.531,12.43 ccw(c25.547,12.503) 25.6,12.45 ; 25.606,12.455 ccw(c25.622,12.528) 25.675,12.475 ; 25.706,12.48 ccw(c25.722,12.553) 25.775,12.5 ; U100.1@25.831,12.505 ccw(c25.847,12.578) U100.1@25.9,12.525 ; U100.1@25.956,12.505 ccw(c25.972,12.578) U100.1@26.025,12.525
  Top Layer w0.275: U100.9 v1@26.7,15.5
  Top Layer w0.3: C113.1@12.85,26.85 U101.27 ; 13.145,22.35 U101.36 ; 13.225,19.85 U101.41@14.1,19.85 ; 13.25,24.85 U101.31 ; 13.45,16.85 U101.47 ; 13.45,18.35 U101.44 ; 13.75,15.35 U101.50 ; 20.7,13.4 U101.65 ; U101.98@24.22,27.35 U101.98 24.808,27.35 24.872,27.285 ; U101.85 25.25,20.85 ; U101.90 25.65,23.35 ; U101.94 25.45,25.35
  Inner Layer 1 w0.508: 38.35,22.1 CON300.3@39.66,23.41 ; 38.475,24.575 39.64,23.41 CON300.3@39.66,23.41 ; CON300.3 CON300.3@39.66,23.41
  Bottom Layer w0.152: 5.05,21.35 5.175,21.2 ; 8.258,30.106 8.258,29.874 8.258,29.642 8.325,29.575
  Bottom Layer w0.203: 6.5,16.6 6.5,17.3 C201.1 ; C115.1 16.5,17.9 v1(16.8,18.2) v1@16.7,18.2
  Bottom Layer w0.254: 4.821,29.664 4.821,29.827 4.944,29.95 4.975,29.95 ; U201.6 8.1,29.716 8.258,29.874 v1(8.557,30.173) ; U201.1@8.2,27.96 U201.1 ; 8.612,28.331 8.519,28.238 ; J100.S2@24.75,23.6 J100.S2@25.151,24.001 ; CON_PCB100.2 31.107,23.5 31.504,23.103 ; U201.1 8.341,28.06 8.519,28.238 ; U201.1 8.278,28.238 8.519,28.238
  Bottom Layer w0.508: v1(5.5,30.725) 5.5,29.95 C203.1@5.625,29.825 ; C203.1 6.475,29.8 ; v1(8.557,30.173) 9.498,30.173 9.525,30.2 C205.1@9.6,30.125 ; C205.1 C205.1@9.6,30.125 ; v1@9.625,29.15 9.6,29.175 C205.1@9.6,30.125 ; C205.1@9.625,30.1 C205.1@9.6,30.125 ; 38.325,24.65 39.565,23.41 CON300.3 38.6,22.31 38.6,22.25
  Bottom Layer w0.6: 7.4,20.625 U200.2
  other v1: 25.7,0.7 26.4,0.7 27.2,0.7 28,0.7 28.8,0.7 29.6,0.7 30.4,0.7 31.2,0.7 32,0.7 23.9,0.975 25.7,1.5 23.85,1.975 25.7,2.3 25.7,3.1 23.875,3.125 25.7,3.9 23.8,4.675 25.7,4.7 25.7,5.5 23.8,6.2 25.7,6.25 26.15,6.8 30.2,6.8 31,6.8 31.8,6.8 26.7,7.15 29.6,7.2 23.775,7.475 29.2,7.8 26.7,7.875 28.4,7.9 24.475,8.225 21.75,8.525 25.45,8.575 20.7,8.7 26.7,8.7 28.4,8.7 31.775,8.85 28.4,9.4 26.7,9.425 23.15,9.55 20.7,9.8 26.7,10.1 28.4,10.1 29.925,10.1 26.725,10.8 28.4,10.8 20.7,10.9 28.8,11.5 31.7,11.75 22.55,11.8 23.575,11.8 11.2,12 12.3,12 13.4,12 14.5,12 15.5,12 16.6,12 17.7,12 19.8,12 21.6,12.1 24.5,12.1 29.1,12.2 25.2,12.5 17.7,12.7 19.8,12.7 29.1,12.9 21.2,13 30.425,13.025 11.2,13.1 19.8,13.4 22.5,13.4 23.3,13.4 24.1,13.5 29.1,13.6 29.1,14.3 31.725,14.3 1.5,15 3,15 4.5,15 6,15 7.5,15 9.2,15 29.1,15 30.35,15.175 25.1,15.2 25.7,15.7 26.5,15.7 8.35,15.9 31.575,16.025 20.1,16.1 21.6,16.1 9.175,16.55 20.8,16.8 10.075,16.875 22.4,17.1 25.65,17.4 3.05,17.65 10.95,17.75 18.6,18.2 7.45,18.5 25.8,18.5 3,19.45 31.725,19.825 25.6,19.9 5.65,20.4 6.7,20.4 7.8,20.4 19.2,21 16,21.1 17.6,21.1 20.8,21.1 22.4,21.1 3,21.3 12.7,21.6 32.05,21.875 5.475,22.525 26.125,23.025 16,23.1 17.6,23.1 19.2,23.1 20.8,23.1 22.4,23.1 5.475,23.425 9.35,23.45 2.8,23.9 25.801,24.001 16.8,24.1 18.4,24.1 20,24.1 21.6,24.1 28.475,24.3 9.325,24.325 0.7,24.4 1.7,24.4 8.375,24.45 20.8,24.7 16,24.8 17.6,24.8 19.2,24.8 22.4,24.8 32.075,25.175 5.3,25.3 11.9,25.5 13,25.5 0.7,25.6 1.7,25.6 16.8,26.1 18.4,26.1 20,26.1 21.6,26.1 5.3,26.3 28.9,26.375 0.7,26.8 1.7,26.8 11.1,26.8 16,27.1 17.6,27.1 19.2,27.1 20.8,27.1 22.4,27.1 29.4,27.1 27.95,27.125 0.7,28.1 1.7,28.1 16.8,28.1 18.4,28.1 20,28.1 21.6,28.1 26.6,28.1 12.9,28.15 11.4,28.2 27.875,28.6 8.5,28.85 6.6,28.925 4.65,29.025 9.6,29.15 28.85,29.325 11.1,29.9 2.775,30.275 3.525,30.75 14.8,31.1 16,31.1 21.4,31.4 23.1,31.4 5.4,31.475 2.45,31.8 13.5,31.8 19.5,32.4 22.3,32.4 25.4,32.4
  other v2: 26.3,13.5 26.9,13.5 27.5,13.5 28.1,13.5 26.3,14.1 26.9,14.1 27.5,14.1 28.1,14.1
GPS_EN: R102.2 R103.2 TP100.1 U101.93 | length 13
  Top Layer w0.203: U101.93 25.8,24.85 26.825,23.825 26.825,22.95 v1(28.4,21.375) ; v1@28.375,18.7 v1(28.4,18.7) 29.025,18.7 29.65,18.075 R103.2 29.225,17.575 R102.2
  Bottom Layer w0.203: TP100.1 28.4,17.6 v1(28.4,18.7) v1(28.4,21.375)
I/O_SIM: U101.48 U102.6 | length 8.5
  Top Layer w0.254: v1@10.988,16.35 U101.48
  Bottom Layer w0.254: v1@10.988,16.35 U102.6
  other v1: 10.988,16.37
LED1: Q100.1 R113.1 U101.15 | length 11.1
  Top Layer w0.254: U101.15 17.2,29.4 17.4,29.2 v1(17.9,29.2)
  Bottom Layer w0.254: v1(17.9,29.2) 23.175,29.2 R113.1@25.2,27.175 ; R113.1@25.075,27.175 R113.1@25.2,27.175 ; Q100.1 25.314,27.189 R113.1 R113.1@25.2,27.175
LED2: Q101.1 R112.1 U101.16 | length 12.4
  Top Layer w0.3: v1(16.7,29) U101.16
  Bottom Layer w0.3: v1(16.7,29) 16.805,29 18.373,30.567 25.267,30.567 25.364,30.664 Q101.1 ; Q101.1@26.579,30.567 26.88,30.644 Q101.1@27.1,30.7
NetA100_2: A100.2 L100.2 L101.2 | length 1.9
  Top Layer w0.305: 27.55,6.075 27.55,6.95 L101.2 L100.2
NetA101_1: A101.1 A101.2 | length 1.5
  Top Layer w0.635: A101.1 A101.2
NetA101_3: A101.3 L104.2 | length 2
  Top Layer w0.254: A101.3@19.2,6.85 A101.3
  Top Layer w0.305: L104.2 18.9,7.15 A101.3@19.2,6.85
NetA101_4: A101.4 L105.2 | length 3.1
  Top Layer w0.305: A101.4 22.25,8.05 22.968,8.768 L105.2@23.8,8.768
NetC100_1: C100.1 U100.10 | length 4
  Top Layer w0.305: C100.1 ccw(c23.4,15.014) 25.107,13.307 ccw(c24.159,14.256) 25.5,14.256 25.5,14.431 cw(c26.056,14.431) U100.10
NetC100_2: C100.2 U101.67 | length 1.8
  Top Layer w0.305: U101.67 21.7,13.907 ccw(c23.407,13.907) C100.2@22.2,12.7 ; C100.2@22.3,12.7 C100.2@22.4,12.7
NetC101_2: C101.2 C102.2 C119.2 FB101.1 U100.3 | length 26.8
  Top Layer w0.275: C101.2 26.085,11.1 26.727,11.742 27.193,12.207 U100.3
  Top Layer w0.381: v1(10.3,23.9) FB101.1 ; v1(24.267,10.565) 24.394,10.565 24.929,11.1 C102.2 C101.2
  Inner Layer 2 w0.381: v1(10.3,23.9) 10.3,22.838 15.648,17.49 16.861,17.49 ; 16.852,17.5 16.861,17.49 ; v1@20.4,15.2 20,15.2 17.71,17.49 16.861,17.49
  Bottom Layer w0.381: v1(20.5,15.2) 20.5,12.248 21.948,10.8 23.131,10.8 C119.2 ; C119.2@23.2,10.7 C119.2@23.4,10.7 ; C119.2@23.334,10.766 C119.2@23.4,10.7 ; v1(24.267,10.565) 23.366,10.565 23.4,10.599 C119.2@23.4,10.7
NetC106_2: C106.2 C107.2 R102.1 U100.2 | length 9.2
  Top Layer w0.254: v1(25.9,11.891) 26.236,11.891 26.7,12.355 U100.2 ; v1(26.226,16.501) 26.225,16.502 26.225,16.8 26.9,17.475 R102.1@26.9,17.675
  Bottom Layer w0.254: v1(25.9,11.891) 25.9,12.7 24.325,14.275 24.325,15 24.225,15.1 24.225,15.187 25.539,16.501 v1(26.226,16.501)
NetC108_1: C108.1 L104.1 | length 1.1
  Top Layer w0.305: C108.1 18.8,9.632 L104.1
NetC108_2: C108.2 L103.2 | length 1
  Top Layer w0.254: L103.2 18.7,11.535 C108.2
NetC109_2: C109.2 C110.2 R105.1 U101.12 | length 4.3
  Top Layer w0.305: U101.12 18.7,31.293 C110.2@18.707,31.3
  Top Layer w0.508: R105.1 16.85,32.4 C109.2@17.2,32.05 ; C109.2 18.107,32.1 C110.2@18.707,31.5
NetC111_2: C111.2 C112.2 C113.2 R106.1 U101.22 | length 9.4
  Top Layer w0.305: C113.2 C113.2@12.393,29.2 ; 13.3,29.2 13.45,29.2 13.6,29.35 ; 13.375,29.225 13.375,29.35 13.5,29.35 ; 13.5,29.33 13.5,29.35 ; U101.22 13.6,29.35 ; 13.5,29.35 13.6,29.35
  Top Layer w0.508: C113.2 12.9,29.893 C112.2@12.9,30.9 ; C113.2@12.393,29.2 13.3,29.2
  Top Layer w0.635: R106.1 9.158,32.3 10.558,30.9 C112.2@12.7,30.9
NetC115_2: C115.2 J100.C1 R107.2 U102.5 | length 14.3
  Top Layer w0.254: R107.2@11.8,14.1 12.6,13.3 v1(12.8,13.3)
  Inner Layer 2 w0.254: v1(12.8,13.3) 12.8,15.464 13.559,16.223 ; v1(12.8,18.1) 13.559,17.341 13.559,16.223 ; v1(15.1,15.5) 14.282,15.5 13.559,16.223
  Bottom Layer w0.254: v1(12.8,18.1) 13,17.9 C115.2 14.4,18.35 J100.C1@15.425,19.375 ; v1(15.1,15.5) 15.45,15.85 U102.5 ; J100.C1@15.135,19.21 15.425,19.5 J100.C1@15.425,19.375 ; J100.C1@15.425,19.225 J100.C1@15.425,19.375
NetC201_2: C201.2 R202.1 R203.1 U200.4 | length 5.6
  Bottom Layer w0.508: R202.1@7.1,16.2 8.3,17.4 C201.2 8.35,17.55 U200.4 8.35,19.55 9.1,20.3 R203.1
NetC202_2: C202.2 R201.2 U200.3 | length 7
  Bottom Layer w0.508: R201.2 4.4,24.2 7.5,24.2 8.3,23.4 C202.2 8.35,23.15 U200.3
NetC203_2: C203.2 R205.1 R206.1 U201.3 | length 6
  Top Layer w0.305: R206.1 4.4,28.1 v1(4.7,28.1)
  Bottom Layer w0.305: C203.2@5.5,28.2 C203.2@5.6,28.1 ; C203.2 C203.2@5.6,28.1 ; U201.3 5.64,28.06 C203.2@5.6,28.1
  Bottom Layer w0.635: R205.1@3.9,28.2 C203.2
NetC204_1: C204.1 R207.2 R209.1 U201.5 | length 4.9
  Bottom Layer w0.254: R209.1 R207.2@8,31.3 ; U201.5 U201.5 7.602,29.938 7.877,30.213 7.877,31.277 R207.2 8.4,31.8 C204.1 ; C204.1@9,31.7 C204.1@9,31.8
NetCON200_2: CON200.2 R200.2 | length 2
  Bottom Layer w0.508: CON200.2 3.04,32.74 R200.2@3.2,32.9
NetCON300_5: CON300.5 CON_PCB100.3 R111.2 | length 16.7
  Top Layer w0.305: v1(30.426,20.701) 30.426,19.973 30.6,19.8 R111.2
  Inner Layer 2 w0.254: v1(30.426,20.701) 30.426,21.676 31.628,22.878 34.647,22.878 35.855,21.67 35.855,20.33 36.62,19.565 38.395,19.565 CON300.5
  Bottom Layer w0.254: CON300.5@39.32,20.87 CON300.5
  Bottom Layer w0.305: v1(30.426,20.701) 30.426,21.671 CON_PCB100.3
NetFB100_2: FB100.2 R104.2 U101.102 | length 2.3
  Top Layer w0.254: FB100.2 25.05,29.35 25.5,28.9 R104.2@25.7,28.9
  Top Layer w0.3: U101.102 25.05,29.35
NetJ100_C2: J100.C2 U102.1 | length 2.2
  Bottom Layer w0.254: J100.C2@17.965,19.5 17.98,19.485 U102.1
NetJ100_C3: J100.C3 U102.2 | length 4.3
  Bottom Layer w0.254: U102.2 18.95,16.85 20.35,18.25 20.35,19.345 J100.C3@20.505,19.5
NetJ100_C7: J100.C7 U102.3 | length 5.5
  Bottom Layer w0.254: U102.3 19.35,16.35 21.6,18.6 21.6,19.325 J100.C7@21.775,19.5
NetL100_1: L100.1 R100.1 | length 0.9
  Top Layer w0.254: L100.1 R100.1
NetL102_1: L102.1 U100.7 | length 1.4
  Top Layer w0.275: U100.7 27.7,15.3 27.82,15.42 27.826,15.42 28.3,15.894 L102.1@28.3,16 ; L102.1@28.36,15.954 L102.1
NetL102_2: L102.2 U100.8 | length 1.1
  Top Layer w0.275: U100.8 27.2,15.8 L102.2@27.4,16
NetL103_1: L103.1 U101.61 | length 1
  Top Layer w0.305: L103.1 U101.61
NetL200_1: L200.1 U201.2 | length 7.8
  Bottom Layer w0.305: L200.1 L200.1@6.41,26.506 ; L200.1@6.7,26.9 L200.1@6.804,26.9 ; L200.1@6.9,26.5 7.35,26.95 7.35,27.25 ; 7.4,27 7.6,27.2 7.6,27.5 ; 7.583,27.679 7.299,27.395 ; U201.2 7.6,27.5 ; L200.1@6.41,26.506 L200.1@6.804,26.9 ; L200.1@6.41,26.506 L200.1@6.41,26.705 ; L200.1@6.41,26.705 7.1,27.395 ; L200.1@6.41,26.705 6.41,27.01 6.795,27.395 7.1,27.395 ; L200.1@6.804,26.9 7,26.9 7.35,27.25 ; L200.1@6.804,26.9 7.299,27.395 ; 7.1,27.395 7.299,27.395 ; 7.35,27.25 7.6,27.5
NetLED100_1: LED100.1 Q100.3 | length 1.3
  Bottom Layer w0.381: Q100.3@29.3,28.075 30.175,28.075 LED100.1@30.475,27.775
NetLED100_2: LED100.2 R109.2 | length 1.4
  Bottom Layer w0.305: LED100.2 31.874,29.125 R109.2@31.925,29.125
NetLED101_1: LED101.1 Q101.3 | length 1.4
  Bottom Layer w0.3: Q101.3 30.188,31.564 LED101.1
NetLED101_2: LED101.2 R110.2 | length 1.3
  Bottom Layer w0.254: LED101.2 31.949,32.474 R110.2
NetLED200_1: LED200.1 U200.1 | length 5.9
  Top Layer w0.508: v1(5.555,21.645) 8.347,21.645 v1(9.202,22.5)
  Bottom Layer w0.508: v1(5.555,21.645) U200.1 ; v1(9.202,22.5) LED200.1
NetLED200_2: LED200.2 R203.2 | length 1.5
  Bottom Layer w0.305: LED200.2 LED200.2@11.325,21.773
  Bottom Layer w0.635: LED200.2@11.325,21.773 11.325,20.375 R203.2
NetR100_2: R100.2 U100.5 | length 1.7
  Top Layer w0.305: R100.2@27.517,10.974 ccw(c26.61,12.4) 28.3,12.4
NetR104_1: R104.1 U101.101 | length 2.9
  Top Layer w0.203: U101.101 24.75,28.85 24.921,28.679 24.921,27.879 R104.1@25.5,27.3 ; R104.1@25.302,27.3 R104.1@25.5,27.3 ; R104.1 25.6,27.2 R104.1@25.5,27.3 ; R104.1@25.7,27.3 R104.1@25.5,27.3
NetR204_1: R204.1 U200.5 | length 6.6
  Top Layer w0.305: v1(5.545,19.155) 8.545,19.155 v1(9.8,17.9)
  Bottom Layer w0.305: v1(5.545,19.155) U200.5 ; v1(9.8,17.9) R204.1
NetR206_2: R206.2 R208.1 U201.4 | length 7.3
  Top Layer w0.254: R208.1 R206.2 5.325,27.425 5.325,28.525 v1(7.1,30.3)
  Bottom Layer w0.254: U201.4 v1(7.1,30.3)
NetU101_43: U101.43 U102.8 | length 8.5
  Top Layer w0.203: v1(12.4,19.6) 12.761,19.6 13.511,18.85 ; 13.6,18.85 13.511,18.85 ; U101.43 13.511,18.85
  Bottom Layer w0.203: v1(12.4,19.6) 12.107,19.307 12.107,17.767 12.524,17.35 U102.8
NetU101_46: U101.46 U102.7 | length 7.4
  Top Layer w0.254: v1(11.7,17.3) 11.75,17.35 U101.46
  Bottom Layer w0.254: v1(11.7,17.3) 11.7,17.2 12.05,16.85 14.85,16.85 U102.7
NRESET: CON300.4 CON_PCB100.5 TP105.1 U101.32 | length 26.8
  Top Layer w0.254: U101.32 14.65,24.35 v1(15,24.7) ; v1@28.5,23.325 v1@28.676,23.501 ; v1(28.501,23.501) v1@28.676,23.501 ; CON300.4 37.065,23.315 29.51,23.315 29.324,23.501 v1@28.676,23.501
  Bottom Layer w0.254: v1(15,24.7) 15.734,25.434 23.816,25.434 24.445,24.805 25.86,24.805 27.175,23.49 TP105.1 27.5,23.325 27.75,23.575 27.824,23.501 v1(28.501,23.501) 29.466,23.501 29.54,23.575 29.79,23.325 CON_PCB100.5@29.965,23.5
RX_NRF: TP101.1 U101.86 | length 4
  Top Layer w0.3: U101.86 25.65,21.35 26.225,20.775 v1(26.25,20.775)
  Bottom Layer w0.3: v1(26.25,20.775) 26.25,20.25 TP101.1
SWDCLK: CON300.6 CON_PCB100.4 TP103.1 U101.33 | length 33
  Top Layer w0.254: v1(11.326,24.876) v1(11.326,24.876) 12.35,23.85 U101.33 ; v1(28.8,22.25) 29.428,22.878 34.647,22.878 36.655,20.87 CON300.6
  Bottom Layer w0.254: v1@11.41,24.79 v1(11.326,24.876) v1(11.326,24.876) 11.397,24.805 13.226,24.805 15.801,22.23 22.77,22.23 23.425,21.575 TP103.1 27.875,22.25 v1(28.8,22.25) 28.82,22.23 CON_PCB100.4 CON_PCB100.4@29.965,22.23
SWDIO: CON300.2 CON_PCB100.6 TP104.1 U101.34 | length 33.1
  Top Layer w0.254: v1(11.151,23.351) 14.079,23.351 U101.34 ; v1(29.175,25.475) 30.903,23.747 34.622,23.747 36.825,25.95 CON300.2
  Inner Layer 2 w0.254: v1(11.151,23.351) 12.379,23.351 12.38,23.35 14.52,25.49 21.853,25.49 22.212,25.85 v1(26.3,25.85)
  Bottom Layer w0.254: v1(26.3,25.85) 26.725,25.425 TP104.1 27.775,25.425 27.975,25.225 28.225,25.475 v1(29.175,25.475) 29.175,25.375 29.78,24.77 CON_PCB100.6@29.965,24.77
TX_NRF: R111.1 TP106.1 U101.87 | length 9.6
  Top Layer w0.254: R111.1 29.775,18.825 v1(31.375,18.825)
  Top Layer w0.3: U101.87 26.75,21.85 R111.1
  Bottom Layer w0.254: TP106.1 v1(31.375,18.825)
pads on no net: A101.5 A101.6 A101.7 CON_PCB100. J100.C6 J200.2 J200.3 J200.4 U101.2 U101.3 U101.4 U101.6 U101.7 U101.8 U101.10 U101.11 U101.13 U101.18 U101.19 U101.20 U101.23 U101.24 U101.25 U101.26 U101.28 U101.29 U101.30 U101.35 U101.37 U101.38 U101.39 U101.40 U101.42 U101.45 U101.51 U101.53 U101.54 U101.55 U101.57 U101.58 U101.59 U101.64 U101.68 U101.69 U101.70 U101.71 U101.73 U101.83 U101.84 U101.88 U101.89 U101.91 U101.92 U101.95 U101.96 U101.97 U101.99 U101.100 U101.104 U101.105 U101.106 U101.107 U101.108 U101.109 U101.110 U101.111 U101.112 U101.113 U101.114 U101.115 U101.116 U101.117 U101.118 U101.119 U101.120 U101.121 U101.122 U101.123 U101.124 U101.125 U101.126 U101.127 U102.4

## Polygon pours and split planes (outlines as drawn)
GND on Top Layer "GND_TopLayer" (solid, remove dead copper, pour order 8): 0,0 0,34 32.7,34 32.7,31.35 43.7,31.35 43.7,15.125 32.7,15.125 32.7,0
GND on Inner Layer 1 "GND_InnerLayer1" (solid, remove dead copper, pour order 9): 0,0 0,34 32.7,34 32.7,31.35 43.7,31.35 43.7,15.125 32.7,15.125 32.7,0
GND on Inner Layer 2 "GND_InnerLayer2" (solid, remove dead copper, pour order 10): 0,0 0,34 32.7,34 32.7,31.35 43.7,31.35 43.7,15.125 32.7,15.125 32.7,0
GND on Bottom Layer "GND_BottomLayer" (solid, remove dead copper, pour order 11): 0,0 0,34 32.7,34 32.7,31.35 43.7,31.35 43.7,15.125 32.7,15.125 32.7,0

## Keep-outs
Keep-Out Layer:
  lines w0.254: 0,0 0,34 32.7,34 32.7,25.125 32.7,24.875 ccw(c33.375,24.875) 33.375,24.2 ccw(c33.375,24.85) 34.025,24.85 34.025,27.85 41.1,27.85 41.1,18.925 41.1,18.929 34.025,18.929 34.025,21.775 ccw(c33.375,21.775) 33.375,22.425 ccw(c33.375,21.75) 32.7,21.75 32.7,0 0,0

## Other copper
Top Layer:
  rectangle net GND: 30.2,1.1 32.3,1.4
  rectangle net GND: 28.1,13.2 29,15.2
  rectangle net GND: 28.45,13.003 29,13.2
  rectangle net GND: 26.309,15.378 26.725,15.8
  rectangle net GND: 25.355,12.4 25.8,13.079
  rectangle net GND: 25.696,12.784 25.95,13.322
  rectangle net GND: 25.873,12.7 26.225,13.103
  rectangle net GND: 22.975,9.675 23.9,10.25
  pour cut-out: 30.512,31.218 30.512,32.132 31.393,32.132 31.825,31.7 31.825,31.075
  pour cut-out: 32.029,26.826 32.268,26.826 32.389,26.948 32.389,31.218 32.138,31.218 31.498,30.578 31.498,27.278 31.476,27.256
  pour cut-out: 30.12,24.97 31.032,24.057 32.636,24.057 32.636,25.793 31.979,26.45 30.913,26.45
  pour cut-out: 18,13.792 18,15 19.5,15 19.5,13.8
  pour cut-out: 32.389,18.37 32.389,18.333 30.403,18.333 30.403,21.503 32.389,21.625
  pour cut-out: 27.478,18.253 27.989,18.253 27.989,17.879 28.971,16.897 28.865,16.791 28.865,16.715 26.695,16.897 26.415,16.046 26.935,16.046
  pour cut-out: 29.455,24.655 29.378,24.598 27.916,23.137 28.566,22.486 29.111,22.486 30.368,23.743
  pour cut-out: 29.285,25.296 29.971,25.982 30.268,25.982 30.7,25.55 29.822,24.672
  pour cut-out: 9.458,24.742 9.88,24.742 9.88,26.27 10.72,26.27 10.72,27.458 9.458,27.458
  pour cut-out: 5.542,27.458 9.458,27.458 9.458,24.742 5.542,24.742
  pour cut-out: 30.49,4.15 30.49,4.77 27.16,4.77 27.16,1.4 30.49,1.4 30.49,2.65 32.29,2.65 32.29,4.15 31.55,4.15 31.55,6.4 27.78,6.4 27.78,5.4 31.23,5.4 31.23,4.15
  pour cut-out: 23.1,8.1 20.4,8.1 20.4,11.6 19.5,11.6 19.5,13.8 18,13.8 18,11.6 10.9,11.6 10.9,14.6 0,14.6 0,0.1 0.1,0 23.1,0
  pour cut-out: 28.865,16.715 26.935,16.715 26.935,15.485 28.865,15.485
  pour cut-out: 10.72,24.33 10.72,26.27 9.88,26.27 9.88,24.33
  pour cut-out: 27.07,29.48 27.07,30.3 25.15,30.3 25.14,30.31 25.13,30.3 25.13,29.48
  pour cut-out: 26.3,1.4 27.16,1.4 27.16,6.4 26.29,6.4
  pour cut-out: 23.1,8.1 23.1,8.4 22.9,8.2
  pour cut-out: 23.878,12.172 24.042,12.172 24.042,12.206 23.964,12.284 23.933,12.253 23.878,12.253
  pour cut-out: 26.378,27.778 26.378,28.222 25.205,28.222 25.205,28.006 25.434,27.778
  pour cut-out: 29,6.4 29,7.4 28.1,7.374 28.1,11.4 27,11.4 27,6.4
  pour cut-out: 28.675,21.825 29.872,22.599 32.025,22.45 32.855,21.923 30.499,20.536 28.775,21.275
  pour cut-out: 26.75,22.175 28.25,22.2 28.2,21.75 27.4,21.5
  pour cut-out: 30.724,28.522 30.725,26.525 31.1,26.375 31.302,26.898
  pour cut-out: 31.24,26.04 32.389,26.04 32.389,26.948 30.913,26.45
  pour cut-out: 25.807,32.313 25.8,33.725 27.176,33.689 27.089,32.313
  pour cut-out: 25.807,30.687 25.825,30.32 25.993,30.328 26.138,30.811
  pour cut-out: 23.438,30.611 23.425,30.375 23.696,30.418 23.677,30.611
  pour cut-out: 4.992,26.651 5.542,26.651 5.542,27.037 5.418,27.088
  pour cut-out: 3.378,25.822 3.822,25.822 3.822,25.578 4.087,25.578 4.087,25.822
  pour cut-out: 3.822,25.822 3.378,25.822 3.375,26.05 3.825,26.05
  pour cut-out: 10.532,16.555 10.01,15.585 11.119,15.43 11.2,15.925
  pour cut-out: 13.575,18.175 13.25,18.175 13.25,18.025 13.675,17.9
  pour cut-out: 12.612,18.555 11.512,17.755 11.931,17.516 12.525,17.775
  pour cut-out: 13.632,19.65 13,19.65 13.505,19.259 13.632,19.312
Inner Layer 1:
  pour cut-out: 18,13.792 18,15 19.5,15 19.5,13.8
  pour cut-out: 9.458,24.742 9.88,24.742 9.88,26.27 10.72,26.27 10.72,27.5 9.458,27.458
  pour cut-out: 5.542,27.458 9.458,27.458 9.458,24.742 5.542,24.742
  pour cut-out: 30.49,4.15 30.49,4.77 27.15,4.77 27.15,1.4 30.49,1.4 30.49,2.65 32.29,2.65 32.29,4.15 31.55,4.15 31.55,6.4 27.78,6.4 27.78,5.4 31.23,5.4 31.23,4.15 30.49,4.15
  pour cut-out: 23.1,8.1 20.4,8.1 20.4,11.6 19.5,11.6 19.5,13.8 18,13.8 18,11.6 10.9,11.6 10.9,14.6 0,14.6 0,0.1 0.1,0 23.1,0
  pour cut-out: 26.935,16.715 28.865,16.715 28.865,15.485 26.935,15.485
  pour cut-out: 10.72,24.33 10.72,26.27 9.88,26.27 9.88,24.33
  pour cut-out: 27.07,29.48 27.07,30.3 27.05,30.32 25.13,30.32 25.13,29.48
  pour cut-out: 26.301,1.4 27.16,1.4 27.16,6.4 26.291,6.4
  pour cut-out: 29.175,6.4 29.175,7.4 28.075,7.4 28.075,11.4 27,11.4 27,6.4
Inner Layer 2:
  pour cut-out: 18,13.792 18,15 19.5,15 19.5,13.8
  pour cut-out: 32.069,20.507 32.389,20.507 32.389,20.715 32.207,20.715
  pour cut-out: 32.389,24.875 32.389,21.736 32.912,22.042 33.725,22.15 33.725,24.125
  pour cut-out: 9.458,24.742 9.88,24.742 9.88,26.27 10.72,26.27 10.72,27.686 9.458,26.424
  pour cut-out: 5.542,27.458 9.458,27.458 9.458,24.742 5.542,24.742
  pour cut-out: 30.49,4.15 30.49,4.77 27.15,4.77 27.15,1.4 30.49,1.4 30.49,2.65 32.29,2.65 32.29,4.15 31.55,4.15 31.55,6.4 27.78,6.4 27.78,5.4 31.23,5.4 31.23,4.15 30.49,4.15
  pour cut-out: 23.1,8.1 20.4,8.1 20.4,11.6 19.5,11.6 19.5,13.8 18,13.8 18,11.6 10.9,11.6 10.9,14.6 0,14.6 0,0.1 0.1,0 23.1,0
  pour cut-out: 26.935,16.715 28.865,16.715 28.865,15.485 26.935,15.485
  pour cut-out: 10.72,24.33 10.72,26.27 9.88,26.27 9.88,24.33
  pour cut-out: 27.07,29.48 27.07,30.3 25.15,30.3 25.13,30.32 25.13,29.48
  pour cut-out: 26.301,1.4 27.16,1.4 27.16,6.4 26.291,6.4
  pour cut-out: 29.175,6.4 29.175,7.4 28.1,7.4 28.1,11.4 27,11.4 27,6.4
Bottom Layer:
  rectangle net GND: 8.711,29.538 10.489,31.062
  rectangle net GND: 8.227,28.321 8.6,30.173
  rectangle net GND: 4.9,28.95 6.379,30.454
  rectangle net GND: 4.65,29.025 5.473,29.83
  rectangle net GND: 5.565,28.778 6.379,28.95
  pour cut-out: 28.8,25.8 29.925,26.525 29.85,25.675
  pour cut-out: 29.918,27.191 29.925,26.525 30.5,26.6 30.6,27.225
  pour cut-out: 31.035,27.191 31.315,27.191 31.315,27.49 31.325,27.5 31.275,27.55 30.975,27.55
  pour cut-out: 31.625,27.3 32.95,27.3 33.125,27.125 32.825,26.825 32.825,23.875 31.561,23.875 31.187,24.249
  pour cut-out: 18,13.792 18,15 19.5,15 19.5,13.8
  pour cut-out: 24.372,28.408 24.372,29.102 24.999,29.729 24.647,30.08 24.647,30.233 23.717,30.233 23.866,30.084 23.866,28.948
  pour cut-out: 25,28.585 25,27.765 24.864,27.902 24.864,27.916 24.372,28.408 24.497,28.534 24.497,28.585
  pour cut-out: 26.25,25.15 29,25.15 29.967,26.005 31.38,25.35 30.025,24.275 29.6,23.85 29.6,22.975 27.85,23.25 26.325,24.275 26.15,24.775
  pour cut-out: 26.449,21.886 26.449,23.224 26.465,23.24 26.847,22.858 26.963,22.858 26.963,22.458 26.79,22.285 26.925,22.15 26.975,22.15
  pour cut-out: 26.449,21.886 26.5,21.937 26.5,23.15
  pour cut-out: 9.458,24.742 9.88,24.742 9.88,26.27 10.72,26.27 10.72,27.5 9.458,27.3
  pour cut-out: 5.542,27.458 9.458,27.458 9.458,24.742 5.542,24.742
  pour cut-out: 30.49,4.15 30.49,4.77 27.15,4.77 27.15,1.4 30.49,1.4 30.49,2.65 32.29,2.65 32.29,4.15 31.55,4.15 31.55,6.4 27.78,6.4 27.78,5.4 31.23,5.4 31.23,4.15 30.49,4.15
  pour cut-out: 23.1,8.1 20.4,8.1 20.4,11.6 19.5,11.6 19.5,13.8 18,13.8 18,11.6 10.9,11.6 10.9,14.6 0,14.6 0,0.1 0.1,0 23.1,0
  pour cut-out: 26.935,16.715 28.865,16.715 28.865,15.485 26.935,15.485
  pour cut-out: 10.72,24.33 10.72,26.27 9.88,26.27 9.88,24.33
  pour cut-out: 27.07,29.48 27.07,30.32 25.13,30.32 25.13,29.48
  pour cut-out: 26.301,1.4 27.16,1.4 27.16,6.4 26.291,6.4
  pour cut-out: 29.175,6.4 29.175,7.4 28.1,7.4 28.1,11.4 27,11.4 27,6.4
  pour cut-out: 27.199,23.299 26.988,23.088 26.988,22.992 27.412,22.992 27.4,23.004 27.4,23.215
  pour cut-out: 29.131,20.507 28.685,20.507 28.685,20.715 28.993,20.715
  pour cut-out: 4.378,27.078 5.554,27.078 5.537,27.622 4.294,27.622
  pour cut-out: 6.75,32.261 6.75,31.875 7.45,31.875 7.254,32.322
  pour cut-out: 26.022,29.353 24.9,29.35 25.13,30.233 26.075,30.05
  pour cut-out: 27.378,30.111 27.371,29.368 27.07,29.635 27.05,30.05 27.07,30.1
  pour cut-out: 25.975,29.225 25.1,29.175 25.143,29.351 26.022,29.353
  pour cut-out: 20.351,18.851 18.075,18.825 18.15,17.075 20.126,17.075

## Silkscreen, mask and mechanical layers (free items; w line width, h text height)
Bottom Overlay:
  lines w0.254: -61.651,-25.521 -50.951,-25.521
Bottom Paste:
  lines w0.254: 32.7,24.2 33.375,24.2

## Text inside footprints (layer, text, board x,y; h text height)
J200: Bottom Overlay "PCB END" at 0.2,24.25 h0.41 r270